# Allegro board volt_ctrl.brd
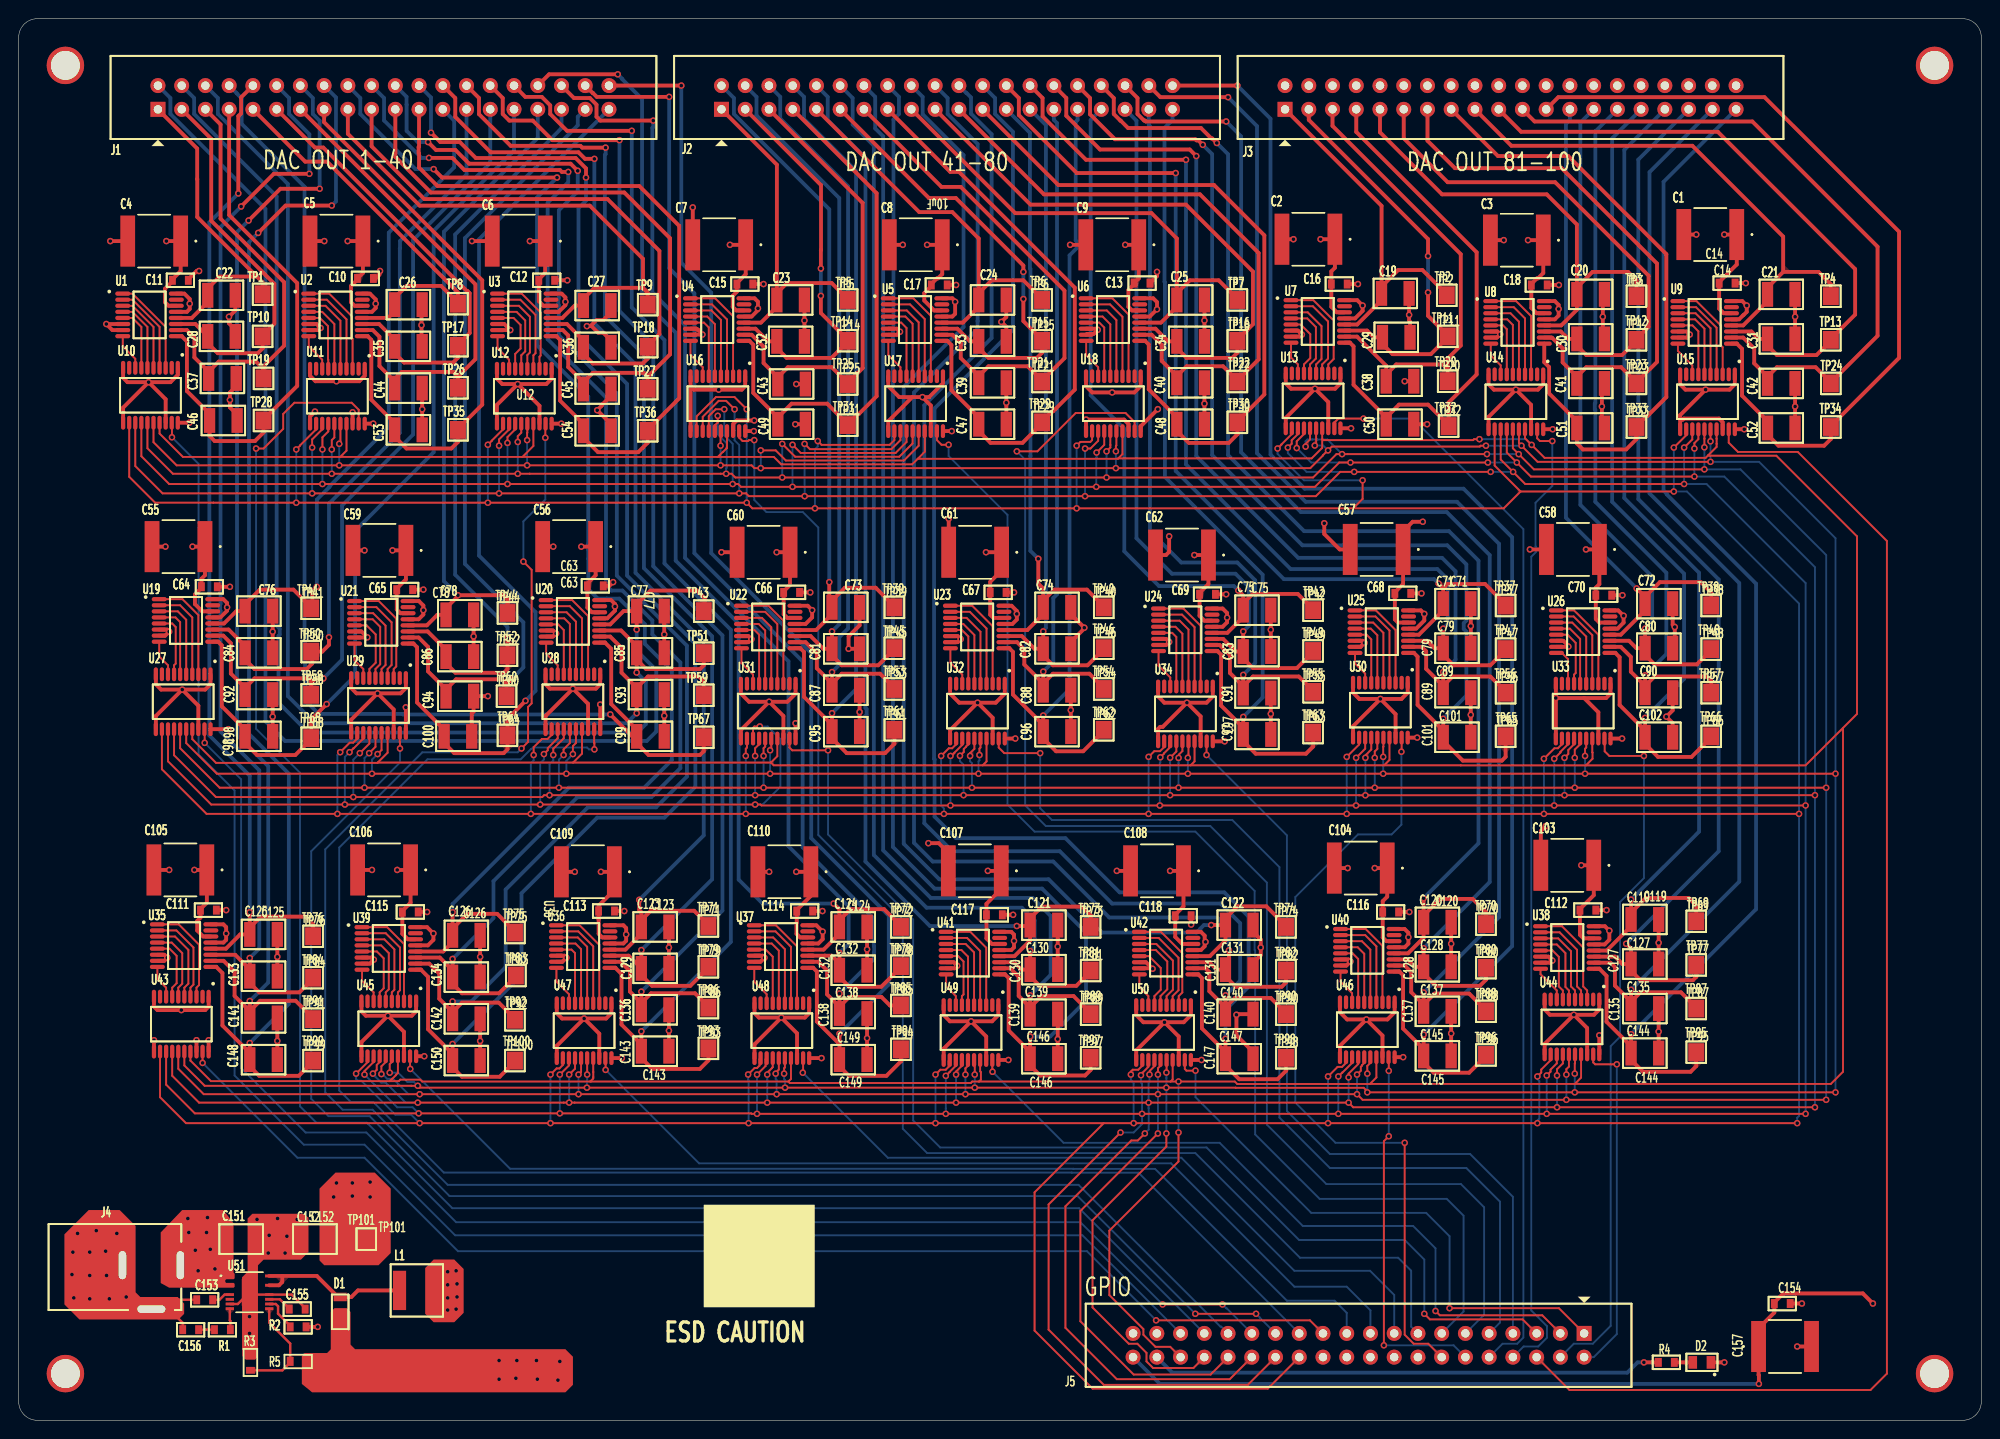
[diagram p0: board, top side]
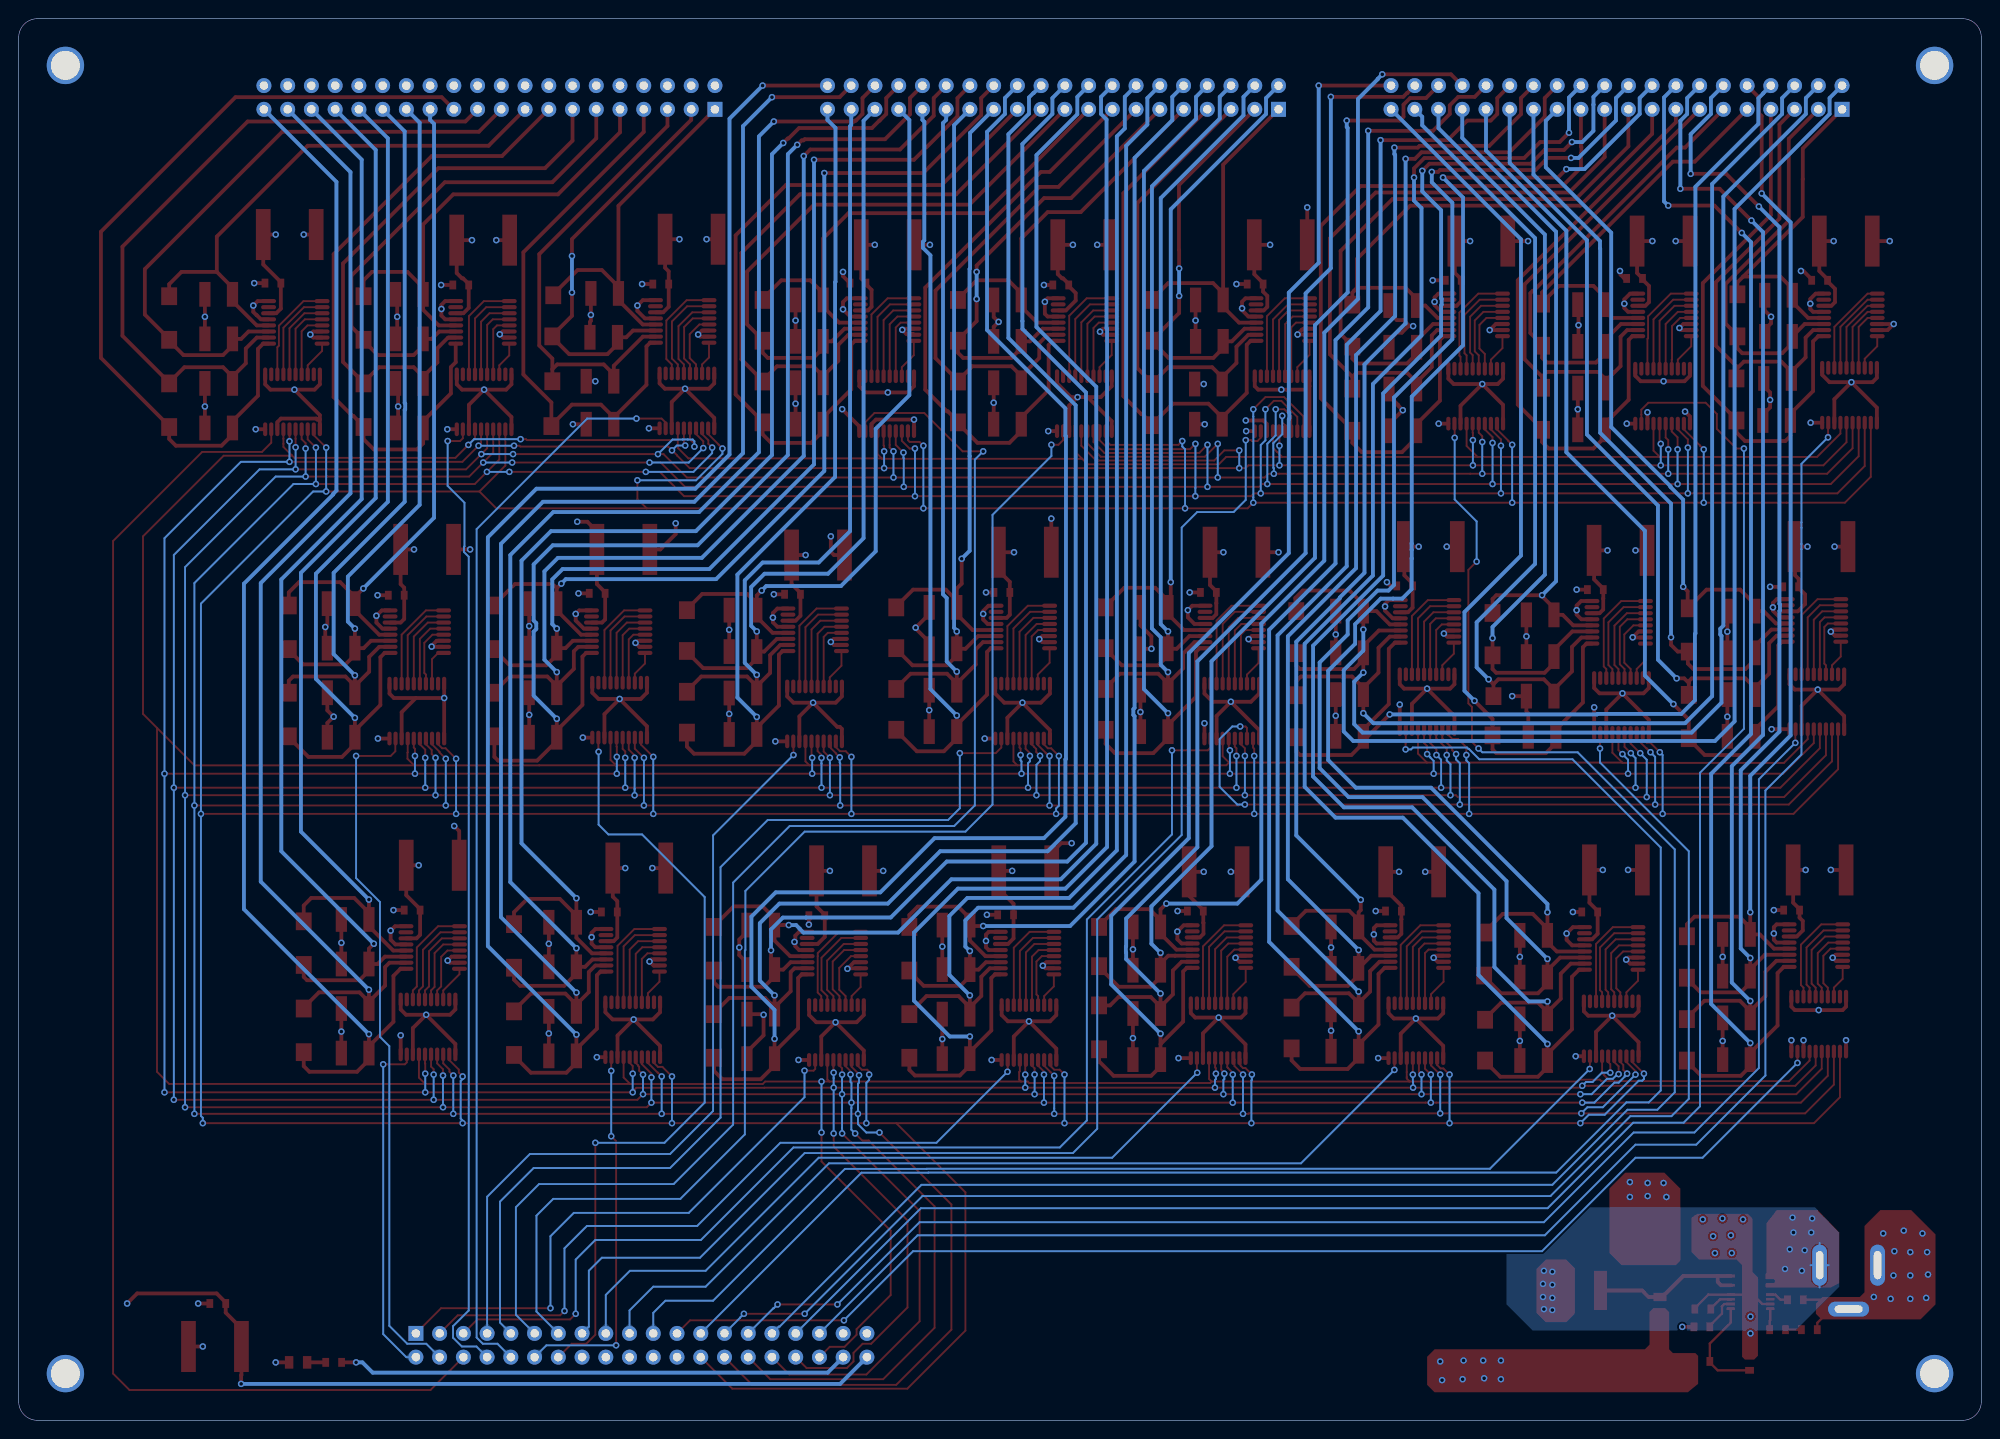
[diagram p1: board, bottom side, seen from below]

Outline 210 x 150 mm; copper layers: TOP, GND, PWR, BOTTOM. Coordinates in mm from the lower left corner of the outline.
Outline path: 0,148 arc(0.59,149.41) 2,150 208,150 arc(209.41,149.41) 210,148 210,2 arc(209.41,0.59) 208,0 2,0 arc(0.59,0.59) 0,2 0,148

## Design rules (mm)
constraint set DEFAULT: min track width 0.203

## Placement (name value [footprint] x y rotation side)
C1  10uF  [2220_AVX-M]  181 126.9 180 top
C2  10uF  [2220_AVX-M]  138 126.4 180 top
C3  10uF  [2220_AVX-M]  160.3 126.3 180 top
C4  10uF  [2220_AVX-M]  14.5 126.2 180 top
C5  10uF  [2220_AVX-M]  34 126.2 180 top
C6  10uF  [2220_AVX-M]  53.5 126.2 180 top
C7  10uF  [2220_AVX-M]  74.96 125.8 180 top
C8  10uF  [2220_AVX-M]  95.99 125.8 180 top
C9  10uF  [2220_AVX-M]  117.01 125.8 180 top
C10  0.1uF  [CAP0603]  37.1 122.2 0 top
C11  0.1uF  [CAP0603]  17.3 122 0 top
C12  0.1uF  [CAP0603]  56.5 122 0 top
C13  0.1uF  [CAP0603]  120.2 121.7 0 top
C14  0.1uF  [CAP0603]  182.8 121.7 0 top
C15  0.1uF  [CAP0603]  77.7 121.6 0 top
C16  0.1uF  [CAP0603]  141.3 121.6 0 top
C17  0.1uF  [CAP0603]  98.5 121.5 0 top
C18  0.1uF  [CAP0603]  162.7 121.5 0 top
C19  4.7uF  [CAP1210]  147.3 120.6 180 top
C20  4.7uF  [CAP1210]  168.2 120.5 180 top
C21  4.7uF  [CAP1210]  188.6 120.5 180 top
C22  4.7uF  [CAP1210]  21.7 120.4 180 top
C23  4.7uF  [CAP1210]  82.6 119.9 180 top
C24  4.7uF  [CAP1210]  104.2 119.9 180 top
C25  4.7uF  [CAP1210]  125.4 119.9 180 top
C26  4.7uF  [CAP1210]  41.7 119.4 180 top
C27  4.7uF  [CAP1210]  61.9 119.3 180 top
C28  4.7uF  [CAP1210]  21.7 116 180 top
C29  4.7uF  [CAP1210]  147.4 115.9 180 top
C30  4.7uF  [CAP1210]  168.2 115.73 180 top
C31  4.7uF  [CAP1210]  188.6 115.73 180 top
C32  4.7uF  [CAP1210]  82.6 115.47 180 top
C33  4.7uF  [CAP1210]  104.2 115.47 180 top
C34  4.7uF  [CAP1210]  125.4 115.47 180 top
C35  4.7uF  [CAP1210]  41.7 114.93 180 top
C36  4.7uF  [CAP1210]  61.9 114.83 180 top
C37  4.7uF  [CAP1210]  21.8 111.5 180 top
C38  4.7uF  [CAP1210]  147.8 111.2 180 top
C39  4.7uF  [CAP1210]  104.2 111.03 180 top
C40  4.7uF  [CAP1210]  125.4 111.03 180 top
C41  4.7uF  [CAP1210]  168.2 110.97 180 top
C42  4.7uF  [CAP1210]  188.6 110.97 180 top
C43  4.7uF  [CAP1210]  82.7 110.9 180 top
C44  4.7uF  [CAP1210]  41.7 110.47 180 top
C45  4.7uF  [CAP1210]  61.9 110.37 180 top
C46  4.7uF  [CAP1210]  21.9 107 180 top
C47  4.7uF  [CAP1210]  104.2 106.6 180 top
C48  4.7uF  [CAP1210]  125.4 106.6 180 top
C49  4.7uF  [CAP1210]  82.7 106.6 180 top
C50  4.7uF  [CAP1210]  147.8 106.6 180 top
C51  4.7uF  [CAP1210]  168.2 106.2 180 top
C52  4.7uF  [CAP1210]  188.6 106.2 180 top
C53  4.7uF  [CAP1210]  41.7 106 180 top
C54  4.7uF  [CAP1210]  61.9 105.9 180 top
C55  10uF  [2220_AVX-M]  17.1 93.5 180 top
C56  10uF  [2220_AVX-M]  58.9 93.5 180 top
C57  10uF  [2220_AVX-M]  145.3 93.2 180 top
C58  10uF  [2220_AVX-M]  166.3 93.2 180 top
C59  10uF  [2220_AVX-M]  38.6 93.1 180 top
C60  10uF  [2220_AVX-M]  79.7 92.9 180 top
C61  10uF  [2220_AVX-M]  102.34 92.9 180 top
C62  10uF  [2220_AVX-M]  124.47 92.6 180 top
C63  0.1uF  [CAP0603]  61.7 89.3 0 top
C64  0.1uF  [CAP0603]  20.4 89.2 0 top
C65  0.1uF  [CAP0603]  41.3 88.9 0 top
C66  0.1uF  [CAP0603]  82.7 88.6 0 top
C67  0.1uF  [CAP0603]  104.8 88.6 0 top
C68  0.1uF  [CAP0603]  148.1 88.5 0 top
C69  0.1uF  [CAP0603]  127.2 88.4 0 top
C70  0.1uF  [CAP0603]  169.6 88.3 0 top
C71  4.7uF  [CAP1210]  153.9 87.4 180 top
C72  4.7uF  [CAP1210]  175.5 87.4 180 top
C73  4.7uF  [CAP1210]  88.5 87 180 top
C74  4.7uF  [CAP1210]  111.1 87 180 top
C75  4.7uF  [CAP1210]  132.5 86.7 180 top
C76  4.7uF  [CAP1210]  25.7 86.6 180 top
C77  4.7uF  [CAP1210]  67.6 86.6 180 top
C78  4.7uF  [CAP1210]  47.2 86.2 180 top
C79  4.7uF  [CAP1210]  153.9 82.63 180 top
C80  4.7uF  [CAP1210]  175.5 82.63 180 top
C81  4.7uF  [CAP1210]  88.5 82.57 180 top
C82  4.7uF  [CAP1210]  111.1 82.57 180 top
C83  4.7uF  [CAP1210]  132.5 82.27 180 top
C84  4.7uF  [CAP1210]  25.7 82.13 180 top
C85  4.7uF  [CAP1210]  67.6 82.13 180 top
C86  4.7uF  [CAP1210]  47.2 81.73 180 top
C87  4.7uF  [CAP1210]  88.5 78.13 180 top
C88  4.7uF  [CAP1210]  111.1 78.13 180 top
C89  4.7uF  [CAP1210]  153.9 77.87 180 top
C90  4.7uF  [CAP1210]  175.5 77.87 180 top
C91  4.7uF  [CAP1210]  132.5 77.83 180 top
C92  4.7uF  [CAP1210]  25.7 77.67 180 top
C93  4.7uF  [CAP1210]  67.6 77.67 180 top
C94  4.7uF  [CAP1210]  47.2 77.5 180 top
C95  4.7uF  [CAP1210]  88.5 73.7 180 top
C96  4.7uF  [CAP1210]  111.1 73.7 180 top
C97  4.7uF  [CAP1210]  132.5 73.4 180 top
C98  4.7uF  [CAP1210]  25.7 73.2 180 top
C99  4.7uF  [CAP1210]  67.6 73.2 180 top
C100  4.7uF  [CAP1210]  47 73.2 180 top
C101  4.7uF  [CAP1210]  153.9 73.1 180 top
C102  4.7uF  [CAP1210]  175.5 73.1 180 top
C103  10uF  [2220_AVX-M]  165.7 59.4 180 top
C104  10uF  [2220_AVX-M]  143.6 59.1 180 top
C105  10uF  [2220_AVX-M]  17.3 58.9 180 top
C106  10uF  [2220_AVX-M]  39.1 58.9 180 top
C107  10uF  [2220_AVX-M]  102.3 58.8 180 top
C108  10uF  [2220_AVX-M]  121.8 58.8 180 top
C109  10uF  [2220_AVX-M]  60.9 58.7 180 top
C110  10uF  [2220_AVX-M]  81.93 58.7 180 top
C111  0.1uF  [CAP0603]  20.3 54.6 0 top
C112  0.1uF  [CAP0603]  167.9 54.6 0 top
C113  0.1uF  [CAP0603]  62.9 54.5 0 top
C114  0.1uF  [CAP0603]  84.1 54.5 0 top
C115  0.1uF  [CAP0603]  41.9 54.4 0 top
C116  0.1uF  [CAP0603]  146.8 54.4 0 top
C117  0.1uF  [CAP0603]  104.4 54.1 0 top
C118  0.1uF  [CAP0603]  124.6 54 0 top
C119  4.7uF  [CAP1210]  174 53.6 180 top
C120  4.7uF  [CAP1210]  151.8 53.3 180 top
C121  4.7uF  [CAP1210]  109.7 53 180 top
C122  4.7uF  [CAP1210]  130.6 53 180 top
C123  4.7uF  [CAP1210]  68.1 52.8 180 top
C124  4.7uF  [CAP1210]  89.3 52.8 180 top
C125  4.7uF  [CAP1210]  26.2 52 180 top
C126  4.7uF  [CAP1210]  47.9 51.9 180 top
C127  4.7uF  [CAP1210]  174 48.83 180 top
C128  4.7uF  [CAP1210]  151.8 48.53 180 top
C129  4.7uF  [CAP1210]  68.1 48.37 180 top
C130  4.7uF  [CAP1210]  109.7 48.23 180 top
C131  4.7uF  [CAP1210]  130.6 48.23 180 top
C132  4.7uF  [CAP1210]  89.3 48.17 180 top
C133  4.7uF  [CAP1210]  26.2 47.53 180 top
C134  4.7uF  [CAP1210]  47.9 47.43 180 top
C135  4.7uF  [CAP1210]  174 44.07 180 top
C136  4.7uF  [CAP1210]  68.1 43.93 180 top
C137  4.7uF  [CAP1210]  151.8 43.77 180 top
C138  4.7uF  [CAP1210]  89.3 43.53 180 top
C139  4.7uF  [CAP1210]  109.7 43.47 180 top
C140  4.7uF  [CAP1210]  130.6 43.47 180 top
C141  4.7uF  [CAP1210]  26.2 43.07 180 top
C142  4.7uF  [CAP1210]  47.9 42.97 180 top
C143  4.7uF  [CAP1210]  68.1 39.5 180 top
C144  4.7uF  [CAP1210]  174 39.3 180 top
C145  4.7uF  [CAP1210]  151.8 39 180 top
C146  4.7uF  [CAP1210]  109.7 38.7 180 top
C147  4.7uF  [CAP1210]  130.6 38.7 180 top
C148  4.7uF  [CAP1210]  26.2 38.6 180 top
C149  4.7uF  [CAP1210]  89.3 38.6 180 top
C150  4.7uF  [CAP1210]  47.9 38.5 180 top
C151  4.7uF  [CAP1210]  23.8 19.4 0 top
C152  4.7uF  [CAP1210]  31.7 19.4 180 top
C153  1uF  [CAP0603]  19.9 12.9 180 top
C154  0.1uF  [CAP0603]  188.7 12.5 180 top
C155  10nF  [CAP0603]  29.8 11.9 0 top
C156  150pF  [CAP0603]  18.4 9.7 180 top
C157  10uF  [2220_AVX-M]  189 7.9 0 top
D1  DFLS260  [DIODE_DFLS260]  34.4 11.6 270 top
D2  LED  [LED0805]  180.1 6.2 180 top
J1  HEADER 20X2  [SHDR2X20-254]  14.9 140.3 0 top
J2  HEADER 20X2  [SHDR2X20-254]  75.2 140.3 0 top
J3  HEADER 20X2  [SHDR2X20-254]  135.5 140.3 0 top
J4  PWR2.5  [DC-005_5521]  14.2 16.6 0 top
J5  HEADER 20X2  [SHDR2X20-254]  167.5 9.3 180 top
L1  6.8uH  [SWPA5040S6R8MT]  42.6 13.9 180 top
NOREF  -  []  0 2 0 top
NOREF#2  -  []  208 0 90 top
NOREF#3  -  [unnamed#2]  5 5 0 top
NOREF#4  -  [unnamed#2]  205 5 0 top
NOREF#5  -  [unnamed#2]  5 145 0 top
NOREF#6  -  [unnamed#2]  205 145 0 top
NOREF#7  -  []  73.3 12.1 0 top
R1  57.6K  [CAP0603]  21.8 9.7 180 top
R2  20K  [CAP0603]  29.9 10 0 top
R3  34.8K  [CAP0603]  24.8 6.2 90 top
R4  2.2K  [CAP0603]  176.3 6.2 0 top
R5  1M  [CAP0603]  29.9 6.3 180 top
TP1  TestPoint  [TESTPOINT_PAD]  26.1 120.5 0 top
TP2  TestPoint  [TESTPOINT_PAD]  152.8 120.4 0 top
TP3  TestPoint  [TESTPOINT_PAD]  173.1 120.3 0 top
TP4  TestPoint  [TESTPOINT_PAD]  193.9 120.3 0 top
TP5  TestPoint  [TESTPOINT_PAD]  88.7 119.9 0 top
TP6  TestPoint  [TESTPOINT_PAD]  109.5 119.9 0 top
TP7  TestPoint  [TESTPOINT_PAD]  130.4 119.9 0 top
TP8  TestPoint  [TESTPOINT_PAD]  47 119.5 0 top
TP9  TestPoint  [TESTPOINT_PAD]  67.3 119.4 0 top
TP10  TestPoint  [TESTPOINT_PAD]  26.1 116 0 top
TP11  TestPoint  [TESTPOINT_PAD]  152.9 116 0 top
TP12  TestPoint  [TESTPOINT_PAD]  173.1 115.63 0 top
TP13  TestPoint  [TESTPOINT_PAD]  193.9 115.63 0 top
TP14  TestPoint  [TESTPOINT_PAD]  88.7 115.53 0 top
TP15  TestPoint  [TESTPOINT_PAD]  109.5 115.53 0 top
TP16  TestPoint  [TESTPOINT_PAD]  130.4 115.53 0 top
TP17  TestPoint  [TESTPOINT_PAD]  47 115 0 top
TP18  TestPoint  [TESTPOINT_PAD]  67.3 114.9 0 top
TP19  TestPoint  [TESTPOINT_PAD]  26.2 111.5 0 top
TP20  TestPoint  [TESTPOINT_PAD]  152.9 111.2 0 top
TP21  TestPoint  [TESTPOINT_PAD]  109.5 111.17 0 top
TP22  TestPoint  [TESTPOINT_PAD]  130.4 111.17 0 top
TP23  TestPoint  [TESTPOINT_PAD]  173.1 110.97 0 top
TP24  TestPoint  [TESTPOINT_PAD]  193.9 110.97 0 top
TP25  TestPoint  [TESTPOINT_PAD]  88.7 110.9 0 top
TP26  TestPoint  [TESTPOINT_PAD]  47 110.5 0 top
TP27  TestPoint  [TESTPOINT_PAD]  67.3 110.4 0 top
TP28  TestPoint  [TESTPOINT_PAD]  26.2 107 0 top
TP29  TestPoint  [TESTPOINT_PAD]  109.5 106.8 0 top
TP30  TestPoint  [TESTPOINT_PAD]  130.4 106.8 0 top
TP31  TestPoint  [TESTPOINT_PAD]  88.7 106.5 0 top
TP32  TestPoint  [TESTPOINT_PAD]  153 106.4 0 top
TP33  TestPoint  [TESTPOINT_PAD]  173.1 106.3 0 top
TP34  TestPoint  [TESTPOINT_PAD]  193.9 106.3 0 top
TP35  TestPoint  [TESTPOINT_PAD]  47 106 0 top
TP36  TestPoint  [TESTPOINT_PAD]  67.3 105.9 0 top
TP37  TestPoint  [TESTPOINT_PAD]  159.1 87.2 0 top
TP38  TestPoint  [TESTPOINT_PAD]  181.1 87.2 0 top
TP39  TestPoint  [TESTPOINT_PAD]  93.7 87 0 top
TP40  TestPoint  [TESTPOINT_PAD]  116.1 87 0 top
TP41  TestPoint  [TESTPOINT_PAD]  31.3 86.9 0 top
TP42  TestPoint  [TESTPOINT_PAD]  138.5 86.7 0 top
TP43  TestPoint  [TESTPOINT_PAD]  73.3 86.6 0 top
TP44  TestPoint  [TESTPOINT_PAD]  52.3 86.4 0 top
TP45  TestPoint  [TESTPOINT_PAD]  93.7 82.63 0 top
TP46  TestPoint  [TESTPOINT_PAD]  116.1 82.63 0 top
TP47  TestPoint  [TESTPOINT_PAD]  159.1 82.53 0 top
TP48  TestPoint  [TESTPOINT_PAD]  181.1 82.53 0 top
TP49  TestPoint  [TESTPOINT_PAD]  138.5 82.33 0 top
TP50  TestPoint  [TESTPOINT_PAD]  31.3 82.27 0 top
TP51  TestPoint  [TESTPOINT_PAD]  73.3 82.1 0 top
TP52  TestPoint  [TESTPOINT_PAD]  52.3 81.87 0 top
TP53  TestPoint  [TESTPOINT_PAD]  93.7 78.27 0 top
TP54  TestPoint  [TESTPOINT_PAD]  116.1 78.27 0 top
TP55  TestPoint  [TESTPOINT_PAD]  138.5 77.97 0 top
TP56  TestPoint  [TESTPOINT_PAD]  159.1 77.87 0 top
TP57  TestPoint  [TESTPOINT_PAD]  181.1 77.87 0 top
TP58  TestPoint  [TESTPOINT_PAD]  31.3 77.63 0 top
TP59  TestPoint  [TESTPOINT_PAD]  73.3 77.6 0 top
TP60  TestPoint  [TESTPOINT_PAD]  52.2 77.5 0 top
TP61  TestPoint  [TESTPOINT_PAD]  93.7 73.9 0 top
TP62  TestPoint  [TESTPOINT_PAD]  116.1 73.9 0 top
TP63  TestPoint  [TESTPOINT_PAD]  138.5 73.6 0 top
TP64  TestPoint  [TESTPOINT_PAD]  52.3 73.3 0 top
TP65  TestPoint  [TESTPOINT_PAD]  159.1 73.2 0 top
TP66  TestPoint  [TESTPOINT_PAD]  181.1 73.2 0 top
TP67  TestPoint  [TESTPOINT_PAD]  73.3 73.1 0 top
TP68  TestPoint  [TESTPOINT_PAD]  31.3 73 0 top
TP69  TestPoint  [TESTPOINT_PAD]  179.5 53.4 0 top
TP70  TestPoint  [TESTPOINT_PAD]  157 53.1 0 top
TP71  TestPoint  [TESTPOINT_PAD]  73.8 52.9 0 top
TP72  TestPoint  [TESTPOINT_PAD]  94.4 52.8 0 top
TP73  TestPoint  [TESTPOINT_PAD]  114.7 52.8 0 top
TP74  TestPoint  [TESTPOINT_PAD]  135.6 52.8 0 top
TP75  TestPoint  [TESTPOINT_PAD]  53.1 52.2 0 top
TP76  TestPoint  [TESTPOINT_PAD]  31.5 51.8 0 top
TP77  TestPoint  [TESTPOINT_PAD]  179.5 48.73 0 top
TP78  TestPoint  [TESTPOINT_PAD]  94.4 48.6 0 top
TP79  TestPoint  [TESTPOINT_PAD]  73.8 48.53 0 top
TP80  TestPoint  [TESTPOINT_PAD]  157 48.43 0 top
TP81  TestPoint  [TESTPOINT_PAD]  114.7 48.13 0 top
TP82  TestPoint  [TESTPOINT_PAD]  135.6 48.13 0 top
TP83  TestPoint  [TESTPOINT_PAD]  53.2 47.6 0 top
TP84  TestPoint  [TESTPOINT_PAD]  31.5 47.37 0 top
TP85  TestPoint  [TESTPOINT_PAD]  94.4 44.4 0 top
TP86  TestPoint  [TESTPOINT_PAD]  73.8 44.17 0 top
TP87  TestPoint  [TESTPOINT_PAD]  179.5 44.07 0 top
TP88  TestPoint  [TESTPOINT_PAD]  157 43.77 0 top
TP89  TestPoint  [TESTPOINT_PAD]  114.7 43.47 0 top
TP90  TestPoint  [TESTPOINT_PAD]  135.6 43.47 0 top
TP91  TestPoint  [TESTPOINT_PAD]  31.5 42.93 0 top
TP92  TestPoint  [TESTPOINT_PAD]  53.1 42.87 0 top
TP93  TestPoint  [TESTPOINT_PAD]  73.8 39.8 0 top
TP94  TestPoint  [TESTPOINT_PAD]  94.4 39.7 0 top
TP95  TestPoint  [TESTPOINT_PAD]  179.5 39.4 0 top
TP96  TestPoint  [TESTPOINT_PAD]  157 39.1 0 top
TP97  TestPoint  [TESTPOINT_PAD]  114.7 38.8 0 top
TP98  TestPoint  [TESTPOINT_PAD]  135.6 38.8 0 top
TP99  TestPoint  [TESTPOINT_PAD]  31.5 38.5 0 top
TP100  TestPoint  [TESTPOINT_PAD]  53.1 38.5 0 top
TP101  TestPoint  [TESTPOINT_PAD]  37.2 19.4 0 top
U1  AD5504  [TSSOP-16N]  14 118.3 0 top
U2  AD5504  [TSSOP-16N]  33.9 118.3 0 top
U3  AD5504  [TSSOP-16N]  54.1 118.3 0 top
U4  AD5504  [TSSOP-16N]  74.74 117.8 0 top
U5  AD5504  [TSSOP-16N]  95.91 117.8 0 top
U6  AD5504  [TSSOP-16N]  117.09 117.8 0 top
U7  AD5504  [TSSOP-16N]  139 117.6 0 top
U8  AD5504  [TSSOP-16N]  160.37 117.5 0 top
U9  AD5504  [TSSOP-16N]  180.4 117.5 0 top
U10  74HC245  [TSSOP-20N]  14.1 109.7 270 top
U11  74HC245  [TSSOP-20N]  34.1 109.6 270 top
U12  74HC245  [TSSOP-20N]  54.1 109.6 270 top
U13  74HC245  [TSSOP-20N]  138.5 109.1 270 top
U14  74HC245  [TSSOP-20N]  160.2 109 270 top
U15  74HC245  [TSSOP-20N]  180.7 109 270 top
U16  74HC245  [TSSOP-20N]  74.81 108.8 270 top
U17  74HC245  [TSSOP-20N]  95.97 108.8 270 top
U18  74HC245  [TSSOP-20N]  117.13 108.8 270 top
U19  AD5504  [TSSOP-16N]  17.9 85.6 0 top
U20  AD5504  [TSSOP-16N]  59.3 85.5 0 top
U21  AD5504  [TSSOP-16N]  38.8 85.4 0 top
U22  AD5504  [TSSOP-16N]  80.2 84.9 0 top
U23  AD5504  [TSSOP-16N]  102.56 84.9 0 top
U24  AD5504  [TSSOP-16N]  124.83 84.6 0 top
U25  AD5504  [TSSOP-16N]  145.85 84.4 0 top
U26  AD5504  [TSSOP-16N]  167.4 84.4 0 top
U27  74HC245  [TSSOP-20N]  17.6 76.9 270 top
U28  74HC245  [TSSOP-20N]  59.3 76.9 270 top
U29  74HC245  [TSSOP-20N]  38.5 76.5 270 top
U30  74HC245  [TSSOP-20N]  145.7 76 270 top
U31  74HC245  [TSSOP-20N]  80.2 75.9 270 top
U32  74HC245  [TSSOP-20N]  102.59 75.9 270 top
U33  74HC245  [TSSOP-20N]  167.4 75.9 270 top
U34  74HC245  [TSSOP-20N]  124.84 75.6 270 top
U35  AD5504  [TSSOP-16N]  17.7 50.8 0 top
U36  AD5504  [TSSOP-16N]  60.4 50.7 0 top
U37  AD5504  [TSSOP-16N]  81.57 50.7 0 top
U38  AD5504  [TSSOP-16N]  165.7 50.6 0 top
U39  AD5504  [TSSOP-16N]  39.6 50.5 0 top
U40  AD5504  [TSSOP-16N]  144.3 50.3 0 top
U41  AD5504  [TSSOP-16N]  102.1 50 0 top
U42  AD5504  [TSSOP-16N]  122.77 50 0 top
U43  74HC245  [TSSOP-20N]  17.4 42.4 270 top
U44  74HC245  [TSSOP-20N]  166.2 42.1 270 top
U45  74HC245  [TSSOP-20N]  39.6 41.9 270 top
U46  74HC245  [TSSOP-20N]  144.3 41.8 270 top
U47  74HC245  [TSSOP-20N]  60.5 41.7 270 top
U48  74HC245  [TSSOP-20N]  81.66 41.7 270 top
U49  74HC245  [TSSOP-20N]  101.9 41.5 270 top
U50  74HC245  [TSSOP-20N]  122.5 41.5 270 top
U51  LT8362  [MSE_16A_ADI]  24.7 13.7 0 top

## Library data of the parts
C1-C9 C55-C62 C103-C110 C157 = CAPACITOR POL
C10-C54 C63-C102 C111-C156 = CAP NP
D1 = DIODE SCHOTTKY
D2 = LED
J1-J3 J5 = HEADER 20X2
J4 = PWR2.5
L1 = INDUCTOR
R1-R5 = R
TP1-TP101 = TestPoint
U1-U9 U19-U26 U35-U42 = AD5504
U10-U18 U27-U34 U43-U50 = 74HC245
U51 = LT8362

## Footprints (pads in the part's own frame, mm; a bottom-side part is the same pattern mirrored in y, then rotated)
2220_AVX-M
  rect 1.575x5.461 smd: 1(-2.832,0) 2(2.832,0)
CAP0603
  rect 0.725x0.95 smd: 1(-0.85,0) 2(0.85,0)
CAP1210
  rect 1.2x2.65 smd: 1(-1.475,0) 2(1.475,0)
DC-005_5521
  oval 4.4x1.6 hole 3x0.8: 2(0,-4.7)
  oval 1.6x4.4 hole 0.8x3: 3(-3.1,0) 4(3.1,0)
DIODE_DFLS260
  rect 0.9x1.4 smd: 1(-1.6,0)
  rect 2.2x1.4 smd: 2(0.95,0)
LED0805
  rect 0.9x1.35 smd: 1(-0.965,0) 2(0.965,0)
MSE_16A_ADI
  rect 0.889x0.305 smd: 1(-2.108,1.751) 3(-2.108,0.751) 5(-2.108,-0.25) 6(-2.108,-0.751) 7(-2.108,-1.251) 8(-2.108,-1.751) 9(2.108,-1.751) 10(2.108,-1.251) 11(2.108,-0.751) 12(2.108,-0.25) 14(2.108,0.751) 16(2.108,1.751)
  rect 1.651x2.845 smd: 17(0,0)
SHDR2X20-254
  rect 1.6x1.6 hole 0.9: 1(0,0)
  round 1.6 hole 0.9: 2(0,2.54) 3(2.54,0) 4(2.54,2.54) 5(5.08,0) 6(5.08,2.54) 7(7.62,0) 8(7.62,2.54) 9(10.16,0) 10(10.16,2.54) 11(12.7,0) 12(12.7,2.54) 13(15.24,0) 14(15.24,2.54) 15(17.78,0) 16(17.78,2.54) 17(20.32,0) 18(20.32,2.54) 19(22.86,0) 20(22.86,2.54) 21(25.4,0) 22(25.4,2.54) 23(27.94,0) 24(27.94,2.54) 25(30.48,0) 26(30.48,2.54) 27(33.02,0) 28(33.02,2.54) 29(35.56,0) 30(35.56,2.54) 31(38.1,0) 32(38.1,2.54) 33(40.64,0) 34(40.64,2.54) 35(43.18,0) 36(43.18,2.54) 37(45.72,0) 38(45.72,2.54) 39(48.26,0) 40(48.26,2.54)
SWPA5040S6R8MT
  rect 1.4x4.2 smd: 1(-1.85,0) 2(1.85,0)
TESTPOINT_PAD
  rect 1.7x1.9 smd: 1(0,0)
TSSOP-16N
  oval 1.6x0.45 smd: 1(-2.862,2.275) 2(-2.862,1.625) 3(-2.862,0.975) 4(-2.862,0.325) 5(-2.862,-0.325) 6(-2.862,-0.975) 7(-2.862,-1.625) 8(-2.862,-2.275) 9(2.862,-2.275) 10(2.862,-1.625) 11(2.862,-0.975) 12(2.862,-0.325) 13(2.862,0.325) 14(2.862,0.975) 15(2.862,1.625) 16(2.862,2.275)
TSSOP-20N
  oval 1.475x0.45 smd: 1(-2.938,2.925) 2(-2.938,2.275) 3(-2.938,1.625) 4(-2.938,0.975) 5(-2.938,0.325) 6(-2.938,-0.325) 7(-2.938,-0.975) 8(-2.938,-1.625) 9(-2.938,-2.275) 10(-2.938,-2.925) 11(2.938,-2.925) 12(2.938,-2.275) 13(2.938,-1.625) 14(2.938,-0.975) 15(2.938,-0.325) 16(2.938,0.325) 17(2.938,0.975) 18(2.938,1.625) 19(2.938,2.275) 20(2.938,2.925)
unnamed#2
  round 4 hole 3.1: (0,0)

## Nets
3V3: J5.38 R4.1
48V: C1.1 C2.1 C3.1 C4.1 C5.1 C6.1 C7.1 C8.1 C9.1 C10.1 C11.1 C12.1 C13.1 C14.1 C15.1 C16.1 C17.1 C18.1 C55.1 C56.1 C57.1 C58.1 C59.1 C60.1 C61.1 C62.1 C63.1 C64.1 C65.1 C66.1 C67.1 C68.1 C69.1 C70.1 C103.1 C104.1 C105.1 C106.1 C107.1 C108.1 C109.1 C110.1 C111.1 C112.1 C113.1 C114.1 C115.1 C116.1 C117.1 C118.1 C152.1 D1.2(CATHODE) R5.1 TP101.1 U1.14 U2.14 U3.14 U4.14 U5.14 U6.14 U7.14 U8.14 U9.14 U19.14 U20.14 U21.14 U22.14 U23.14 U24.14 U25.14 U26.14 U35.14 U36.14 U37.14 U38.14 U39.14 U40.14 U41.14 U42.14
GND: C1.2 C2.2 C3.2 C4.2 C5.2 C6.2 C7.2 C8.2 C9.2 C10.2 C11.2 C12.2 C13.2 C14.2 C15.2 C16.2 C17.2 C18.2 C19.1 C20.1 C21.1 C22.1 C23.1 C24.1 C25.1 C26.1 C27.1 C28.1 C29.1 C30.1 C31.1 C32.1 C33.1 C34.1 C35.1 C36.1 C37.1 C38.1 C39.1 C40.1 C41.1 C42.1 C43.1 C44.1 C45.1 C46.1 C47.1 C48.1 C49.1 C50.1 C51.1 C52.1 C53.1 C54.1 C55.2 C56.2 C57.2 C58.2 C59.2 C60.2 C61.2 C62.2 C63.2 C64.2 C65.2 C66.2 C67.2 C68.2 C69.2 C70.2 C71.1 C72.1 C73.1 C74.1 C75.1 C76.1 C77.1 C78.1 C79.1 C80.1 C81.1 C82.1 C83.1 C84.1 C85.1 C86.1 C87.1 C88.1 C89.1 C90.1 C91.1 C92.1 C93.1 C94.1 C95.1 C96.1 C97.1 C98.1 C99.1 C100.1 C101.1 C102.1 C103.2 C104.2 C105.2 C106.2 C107.2 C108.2 C109.2 C110.2 C111.2 C112.2 C113.2 C114.2 C115.2 C116.2 C117.2 C118.2 C119.1 C120.1 C121.1 C122.1 C123.1 C124.1 C125.1 C126.1 C127.1 C128.1 C129.1 C130.1 C131.1 C132.1 C133.1 C134.1 C135.1 C136.1 C137.1 C138.1 C139.1 C140.1 C141.1 C142.1 C143.1 C144.1 C145.1 C146.1 C147.1 C148.1 C149.1 C150.1 C151.2 C152.2 C153.2 C154.1 C155.2 C156.2 C157.2 D2.1(CATHODE) J4.2 J4.3 J5.37 J5.39 R2.2 R3.2 U1.6 U1.7 U2.6 U2.7 U3.6 U3.7 U4.6 U4.7 U5.6 U5.7 U6.6 U6.7 U7.6 U7.7 U8.6 U8.7 U9.6 U9.7 U10.1 U10.10 U10.11 U10.18 U11.1 U11.10 U11.11 U11.18 U12.1 U12.10 U12.11 U12.18 U13.1 U13.10 U13.11 U13.18 U14.1 U14.10 U14.11 U14.18 U15.1 U15.10 U15.11 U15.18 U16.1 U16.10 U16.11 U16.18 U17.1 U17.10 U17.11 U17.18 U18.1 U18.10 U18.11 U18.18 U19.6 U19.7 U20.6 U20.7 U21.6 U21.7 U22.6 U22.7 U23.6 U23.7 U24.6 U24.7 U25.6 U25.7 U26.6 U26.7 U27.1 U27.10 U27.11 U27.18 U28.1 U28.10 U28.11 U28.18 U29.1 U29.10 U29.11 U29.18 U30.1 U30.10 U30.11 U30.18 U31.1 U31.10 U31.11 U31.18 U32.1 U32.10 U32.11 U32.18 U33.1 U33.10 U33.11 U33.18 U34.1 U34.10 U34.11 U34.18 U35.6 U35.7 U36.6 U36.7 U37.6 U37.7 U38.6 U38.7 U39.6 U39.7 U40.6 U40.7 U41.6 U41.7 U42.6 U42.7 U43.1 U43.10 U43.11 U43.18 U44.1 U44.10 U44.11 U44.18 U45.1 U45.10 U45.11 U45.18 U46.1 U46.10 U46.11 U46.18 U47.1 U47.10 U47.11 U47.18 U48.1 U48.10 U48.11 U48.18 U49.1 U49.10 U49.11 U49.18 U50.1 U50.10 U50.11 U50.18 U51.7 U51.12 U51.17
COE_CLR#: J5.36 U10.17 U11.17 U12.17 U13.17 U14.17 U15.17 U16.17 U17.17 U18.17 U27.17 U28.17 U29.17 U30.17 U31.17 U32.17 U33.17 U34.17 U43.17 U44.17 U45.17 U46.17 U47.17 U48.17 U49.17 U50.17
COE_LDAC#: J5.26 U10.12 U11.12 U12.12 U13.12 U14.12 U15.12 U16.12 U17.12 U18.12 U27.12 U28.12 U29.12 U30.12 U31.12 U32.12 U33.12 U34.12 U43.12 U44.12 U45.12 U46.12 U47.12 U48.12 U49.12 U50.12
COE_SCLK: J5.32 U10.15 U11.15 U12.15 U13.15 U14.15 U15.15 U16.15 U17.15 U18.15 U27.15 U28.15 U29.15 U30.15 U31.15 U32.15 U33.15 U34.15 U43.15 U44.15 U45.15 U46.15 U47.15 U48.15 U49.15 U50.15
COE_SDI: J5.30 U10.14 U11.14 U12.14 U13.14 U14.14 U15.14 U16.14 U17.14 U18.14 U27.14 U28.14 U29.14 U30.14 U31.14 U32.14 U33.14 U34.14 U43.14 U44.14 U45.14 U46.14 U47.14 U48.14 U49.14 U50.14
COE_SDO: J5.28 U10.13 U11.13 U12.13 U13.13 U14.13 U15.13 U16.13 U17.13 U18.13 U27.13 U28.13 U29.13 U30.13 U31.13 U32.13 U33.13 U34.13 U43.13 U44.13 U45.13 U46.13 U47.13 U48.13 U49.13 U50.13
COE_SYNC#: J5.34 U10.16 U11.16 U12.16 U13.16 U14.16 U15.16 U16.16 U17.16 U18.16 U27.16 U28.16 U29.16 U30.16 U31.16 U32.16 U33.16 U34.16 U43.16 U44.16 U45.16 U46.16 U47.16 U48.16 U49.16 U50.16
DAOUT_1: C22.2 J1.1 TP1.1 U1.12
DAOUT_2: C28.2 J1.3 TP10.1 U1.11
DAOUT_3: C37.2 J1.5 TP19.1 U1.10
DAOUT_4: C46.2 J1.7 TP28.1 U1.9(VOUTD)
DAOUT_5: C26.2 J1.9 TP8.1 U2.12
DAOUT_6: C35.2 J1.11 TP17.1 U2.11
DAOUT_7: C44.2 J1.13 TP26.1 U2.10
DAOUT_8: C53.2 J1.15 TP35.1 U2.9(VOUTD)
DAOUT_9: C27.2 J1.17 TP9.1 U3.12
DAOUT_10: C36.2 J1.19 TP18.1 U3.11
DAOUT_11: C45.2 J1.21 TP27.1 U3.10
DAOUT_12: C54.2 J1.23 TP36.1 U3.9(VOUTD)
DAOUT_13: C76.2 J1.25 TP41.1 U19.12
DAOUT_14: C84.2 J1.27 TP50.1 U19.11
DAOUT_15: C92.2 J1.29 TP58.1 U19.10
DAOUT_16: C98.2 J1.31 TP68.1 U19.9(VOUTD)
DAOUT_17: C78.2 J1.33 TP44.1 U21.12
DAOUT_18: C86.2 J1.35 TP52.1 U21.11
DAOUT_19: C94.2 J1.37 TP60.1 U21.10
DAOUT_20: C100.2 J1.39 TP64.1 U21.9(VOUTD)
DAOUT_21: C77.2 J1.2 TP43.1 U20.12
DAOUT_22: C85.2 J1.4 TP51.1 U20.11
DAOUT_23: C93.2 J1.6 TP59.1 U20.10
DAOUT_24: C99.2 J1.8 TP67.1 U20.9(VOUTD)
DAOUT_25: C125.2 J1.10 TP76.1 U35.12
DAOUT_26: C133.2 J1.12 TP84.1 U35.11
DAOUT_27: C141.2 J1.14 TP91.1 U35.10
DAOUT_28: C148.2 J1.16 TP99.1 U35.9(VOUTD)
DAOUT_29: C126.2 J1.18 TP75.1 U39.12
DAOUT_30: C134.2 J1.20 TP83.1 U39.11
DAOUT_31: C142.2 J1.22 TP92.1 U39.10
DAOUT_32: C150.2 J1.24 TP100.1 U39.9(VOUTD)
DAOUT_33: C123.2 J1.26 TP71.1 U36.12
DAOUT_34: C129.2 J1.28 TP79.1 U36.11
DAOUT_35: C136.2 J1.30 TP86.1 U36.10
DAOUT_36: C143.2 J1.32 TP93.1 U36.9(VOUTD)
DAOUT_37: C124.2 J1.34 TP72.1 U37.12
DAOUT_38: C132.2 J1.36 TP78.1 U37.11
DAOUT_39: C138.2 J1.38 TP85.1 U37.10
DAOUT_40: C149.2 J1.40 TP94.1 U37.9(VOUTD)
DAOUT_41: C23.2 J2.1 TP5.1 U4.12
DAOUT_42: C32.2 J2.3 TP14.1 U4.11
DAOUT_43: C43.2 J2.5 TP25.1 U4.10
DAOUT_44: C49.2 J2.7 TP31.1 U4.9(VOUTD)
DAOUT_45: C24.2 J2.9 TP6.1 U5.12
DAOUT_46: C33.2 J2.11 TP15.1 U5.11
DAOUT_47: C39.2 J2.13 TP21.1 U5.10
DAOUT_48: C47.2 J2.15 TP29.1 U5.9(VOUTD)
DAOUT_49: C25.2 J2.17 TP7.1 U6.12
DAOUT_50: C34.2 J2.19 TP16.1 U6.11
DAOUT_51: C40.2 J2.21 TP22.1 U6.10
DAOUT_52: C48.2 J2.23 TP30.1 U6.9(VOUTD)
DAOUT_53: C74.2 J2.25 TP40.1 U23.12
DAOUT_54: C82.2 J2.27 TP46.1 U23.11
DAOUT_55: C88.2 J2.29 TP54.1 U23.10
DAOUT_56: C96.2 J2.31 TP62.1 U23.9(VOUTD)
DAOUT_57: C75.2 J2.33 TP42.1 U24.12
DAOUT_58: C83.2 J2.35 TP49.1 U24.11
DAOUT_59: C91.2 J2.37 TP55.1 U24.10
DAOUT_60: C97.2 J2.39 TP63.1 U24.9(VOUTD)
DAOUT_61: C73.2 J2.2 TP39.1 U22.12
DAOUT_62: C81.2 J2.4 TP45.1 U22.11
DAOUT_63: C87.2 J2.6 TP53.1 U22.10
DAOUT_64: C95.2 J2.8 TP61.1 U22.9(VOUTD)
DAOUT_65: C121.2 J2.10 TP73.1 U41.12
DAOUT_66: C130.2 J2.12 TP81.1 U41.11
DAOUT_67: C139.2 J2.14 TP89.1 U41.10
DAOUT_68: C146.2 J2.16 TP97.1 U41.9(VOUTD)
DAOUT_69: C122.2 J2.18 TP74.1 U42.12
DAOUT_70: C131.2 J2.20 TP82.1 U42.11
DAOUT_71: C140.2 J2.22 TP90.1 U42.10
DAOUT_72: C147.2 J2.24 TP98.1 U42.9(VOUTD)
DAOUT_73: C71.2 J2.26 TP37.1 U25.12
DAOUT_74: C79.2 J2.28 TP47.1 U25.11
DAOUT_75: C89.2 J2.30 TP56.1 U25.10
DAOUT_76: C101.2 J2.32 TP65.1 U25.9(VOUTD)
DAOUT_77: C120.2 J2.34 TP70.1 U40.12
DAOUT_78: C128.2 J2.36 TP80.1 U40.11
DAOUT_79: C137.2 J2.38 TP88.1 U40.10
DAOUT_80: C145.2 J2.40 TP96.1 U40.9(VOUTD)
DAOUT_81: C19.2 J3.1 TP2.1 U7.12
DAOUT_82: C29.2 J3.3 TP11.1 U7.11
DAOUT_83: C38.2 J3.5 TP20.1 U7.10
DAOUT_84: C50.2 J3.7 TP32.1 U7.9(VOUTD)
DAOUT_85: C20.2 J3.9 TP3.1 U8.12
DAOUT_86: C30.2 J3.11 TP12.1 U8.11
DAOUT_87: C41.2 J3.13 TP23.1 U8.10
DAOUT_88: C51.2 J3.15 TP33.1 U8.9(VOUTD)
DAOUT_89: C21.2 J3.17 TP4.1 U9.12
DAOUT_90: C31.2 J3.19 TP13.1 U9.11
DAOUT_91: C42.2 J3.21 TP24.1 U9.10
DAOUT_92: C52.2 J3.23 TP34.1 U9.9(VOUTD)
DAOUT_93: C72.2 J3.25 TP38.1 U26.12
DAOUT_94: C80.2 J3.27 TP48.1 U26.11
DAOUT_95: C90.2 J3.29 TP57.1 U26.10
DAOUT_96: C102.2 J3.31 TP66.1 U26.9(VOUTD)
DAOUT_97: C119.2 J3.33 TP69.1 U38.12
DAOUT_98: C127.2 J3.35 TP77.1 U38.11
DAOUT_99: C135.2 J3.37 TP87.1 U38.10
DAOUT_100: C144.2 J3.39 TP95.1 U38.9(VOUTD)
OE#1: J5.35 U10.19
OE#2: J5.33 U11.19
OE#3: J5.31 U12.19
OE#4: J5.29 U27.19
OE#5: J5.27 U29.19
OE#6: J5.25 U28.19
OE#7: J5.23 U43.19
OE#8: J5.21 U45.19
OE#9: J5.19 U47.19
OE#10: J5.17 U48.19
OE#11: J5.15 U16.19
OE#12: J5.13 U17.19
OE#13: J5.11 U18.19
OE#14: J5.9 U32.19
OE#15: J5.7 U34.19
OE#16: J5.5 U31.19
OE#17: J5.3 U49.19
OE#18: J5.1 U50.19
OE#19: J5.14 U30.19
OE#20: J5.12 U46.19
OE#21: J5.10 U13.19
OE#22: J5.8 U14.19
OE#23: J5.6 U15.19
OE#24: J5.4 U33.19
OE#25: J5.2 U44.19
VLOGIC: C154.2 C157.1 J5.40 U1.13 U1.16 U2.13 U2.16 U3.13 U3.16 U4.13 U4.16 U5.13 U5.16 U6.13 U6.16 U7.13 U7.16 U8.13 U8.16 U9.13 U9.16 U10.20(VDD) U11.20(VDD) U12.20(VDD) U13.20(VDD) U14.20(VDD) U15.20(VDD) U16.20(VDD) U17.20(VDD) U18.20(VDD) U19.13 U19.16 U20.13 U20.16 U21.13 U21.16 U22.13 U22.16 U23.13 U23.16 U24.13 U24.16 U25.13 U25.16 U26.13 U26.16 U27.20(VDD) U28.20(VDD) U29.20(VDD) U30.20(VDD) U31.20(VDD) U32.20(VDD) U33.20(VDD) U34.20(VDD) U35.13 U35.16 U36.13 U36.16 U37.13 U37.16 U38.13 U38.16 U39.13 U39.16 U40.13 U40.16 U41.13 U41.16 U42.13 U42.16 U43.20(VDD) U44.20(VDD) U45.20(VDD) U46.20(VDD) U47.20(VDD) U48.20(VDD) U49.20(VDD) U50.20(VDD)
N08512: U1.1 U10.3
N08516: U1.2 U10.4
N08520: U1.3 U10.5
N08524: U1.4 U10.6
N08528: U1.5 U10.7
N08532: U1.8 U10.8
N17317: U2.1 U11.3
N17361: U2.2 U11.4
N17377: U2.3 U11.5
N17389: U2.4 U11.6
N17405: U2.5 U11.7
N17419: U2.8 U11.8
N18435: U3.1 U12.3
N18441: U3.2 U12.4
N18449: U3.3 U12.5
N18455: U3.4 U12.6
N18463: U3.5 U12.7
N18467: U3.8 U12.8
N19671: U19.1 U27.3
N19677: U19.2 U27.4
N19685: U19.3 U27.5
N19691: U19.4 U27.6
N19699: U19.5 U27.7
N19703: U19.8 U27.8
N20776: U21.1 U29.3
N20782: U21.2 U29.4
N20790: U21.3 U29.5
N20796: U21.4 U29.6
N20804: U21.5 U29.7
N20808: U21.8 U29.8
N21881: U20.1 U28.3
N21887: U20.2 U28.4
N21895: U20.3 U28.5
N21901: U20.4 U28.6
N21909: U20.5 U28.7
N21913: U20.8 U28.8
N22986: U35.1 U43.3
N22992: U35.2 U43.4
N23000: U35.3 U43.5
N23006: U35.4 U43.6
N23014: U35.5 U43.7
N23018: U35.8 U43.8
N24091: U39.1 U45.3
N24097: U39.2 U45.4
N24105: U39.3 U45.5
N24111: U39.4 U45.6
N24119: U39.5 U45.7
N24123: U39.8 U45.8
N25196: U36.1 U47.3
N25202: U36.2 U47.4
N25210: U36.3 U47.5
N25216: U36.4 U47.6
N25224: U36.5 U47.7
N25228: U36.8 U47.8
N26301: U37.1 U48.3
N26307: U37.2 U48.4
N26315: U37.3 U48.5
N26321: U37.4 U48.6
N26329: U37.5 U48.7
N26333: U37.8 U48.8
N27406: U4.1 U16.3
N27412: U4.2 U16.4
N27420: U4.3 U16.5
N27426: U4.4 U16.6
N27434: U4.5 U16.7
N27438: U4.8 U16.8
N28511: U5.1 U17.3
N28517: U5.2 U17.4
N28525: U5.3 U17.5
N28531: U5.4 U17.6
N28539: U5.5 U17.7
N28543: U5.8 U17.8
N29616: U6.1 U18.3
N29622: U6.2 U18.4
N29630: U6.3 U18.5
N29636: U6.4 U18.6
N29644: U6.5 U18.7
N29648: U6.8 U18.8
N30721: U23.1 U32.3
N30727: U23.2 U32.4
N30735: U23.3 U32.5
N30741: U23.4 U32.6
N30749: U23.5 U32.7
N30753: U23.8 U32.8
N31826: U24.1 U34.3
N31832: U24.2 U34.4
N31840: U24.3 U34.5
N31846: U24.4 U34.6
N31854: U24.5 U34.7
N31858: U24.8 U34.8
N32931: U22.1 U31.3
N32937: U22.2 U31.4
N32945: U22.3 U31.5
N32951: U22.4 U31.6
N32959: U22.5 U31.7
N32963: U22.8 U31.8
N34036: U41.1 U49.3
N34042: U41.2 U49.4
N34050: U41.3 U49.5
N34056: U41.4 U49.6
N34064: U41.5 U49.7
N34068: U41.8 U49.8
N35141: U42.1 U50.3
N35147: U42.2 U50.4
N35155: U42.3 U50.5
N35161: U42.4 U50.6
N35169: U42.5 U50.7
N35173: U42.8 U50.8
N36246: U25.1 U30.3
N36252: U25.2 U30.4
N36260: U25.3 U30.5
N36266: U25.4 U30.6
N36274: U25.5 U30.7
N36278: U25.8 U30.8
N37351: U40.1 U46.3
N37357: U40.2 U46.4
N37365: U40.3 U46.5
N37371: U40.4 U46.6
N37379: U40.5 U46.7
N37383: U40.8 U46.8
N38456: U7.1 U13.3
N38462: U7.2 U13.4
N38470: U7.3 U13.5
N38476: U7.4 U13.6
N38484: U7.5 U13.7
N38488: U7.8 U13.8
N39561: U8.1 U14.3
N39567: U8.2 U14.4
N39575: U8.3 U14.5
N39581: U8.4 U14.6
N39589: U8.5 U14.7
N39593: U8.8 U14.8
N40666: U9.1 U15.3
N40672: U9.2 U15.4
N40680: U9.3 U15.5
N40686: U9.4 U15.6
N40694: U9.5 U15.7
N40698: U9.8 U15.8
N41771: U26.1 U33.3
N41777: U26.2 U33.4
N41785: U26.3 U33.5
N41791: U26.4 U33.6
N41799: U26.5 U33.7
N41803: U26.8 U33.8
N42876: U38.1 U44.3
N42882: U38.2 U44.4
N42890: U38.3 U44.5
N42896: U38.4 U44.6
N42904: U38.5 U44.7
N42908: U38.8 U44.8
N92531: D2.2 R4.2
N96106: C151.1 J4.4 L1.1 U51.1 U51.3(VIN)
N106192: D1.1 L1.2 U51.14 U51.16
N106413: R3.1 R5.2 U51.9
N107039: C153.1 U51.5
N107254: R1.1 U51.8
N107258: C156.1 R1.2
N107388: R2.1 U51.10
N107476: C155.1 U51.11

Pads without a net: J3 2 4 6 8 10 12 14 16 18 20 22 24 26 28 30 32 34 36 38 40; J5 16 18 20 22 24; U1 15; U2 15; U3 15; U4 15; U5 15; U6 15; U7 15; U8 15; U9 15; U10 2 9; U11 2 9; U12 2 9; U13 2 9; U14 2 9; U15 2 9; U16 2 9; U17 2 9; U18 2 9; U19 15; U20 15; U21 15; U22 15; U23 15; U24 15; U25 15; U26 15; U27 2 9; U28 2 9; U29 2 9; U30 2 9; U31 2 9; U32 2 9; U33 2 9; U34 2 9; U35 15; U36 15; U37 15; U38 15; U39 15; U40 15; U41 15; U42 15; U43 2 9; U44 2 9; U45 2 9; U46 2 9; U47 2 9; U48 2 9; U49 2 9; U50 2 9; U51 6

## Via types
v1: diameter 0.7, hole 0.4, TOP to BOTTOM, 666 vias

## Routing (per net, layer and track width the routed paths; a pad name or vN(x,y) marks a point on that pad's centre or on a via; arc(x,y) is an arc through that point)
3V3: length 54.8
  TOP w0.406: v1(173.9,6.2) R4.1
  BOTTOM w0.406: v1(173.9,6.2) 173.22,6.2 172.12,5.1 123.44,5.1 J5.38
48V: length 262.7
  TOP w0.406: U36.14 62.44,51.67 62.06,52.06 62.06,53.6 62.05,53.61 C113.1 62.05,55.07 63.73,56.76 C109.1 v1(62.3,58.7) ; U39.14 41.64,51.48 41.05,52.07 C115.1 41.05,54.51 41.93,55.39 C106.1 v1(40.5,58.9) ; 163.24,118.47 162.42,118.47 161.85,119.04 C18.1 161.85,121.61 162.45,122.21 162.56,122.21 163.13,122.78 C3.1 v1(161.5,126.3) ; v1(54.7,126.2) C6.1 56.33,122.79 55.65,122.11 C12.1 55.65,119.77 56.14,119.28 56.96,119.28 ; v1(167.7,93.2) C58.1 169.13,89.49 168.75,89.11 C70.1 168.75,85.76 169.13,85.38 U26.14 ; U41.14 104.14,50.98 103.55,51.57 C117.1 103.55,55.27 105.13,56.86 C107.1 v1(103.7,58.8) ; v1(18.8,58.9) C105.1 20.13,55.39 19.45,54.71 C111.1 19.45,53.79 19.1,53.44 19.1,52.42 19.74,51.77 U35.14 ; v1(97.2,125.8) C8.1 98.82,122.67 98.36,122.21 98.25,122.21 97.65,121.61 C17.1 97.65,121.39 96.9,120.64 96.9,119.83 97.96,118.78 98.78,118.78 ; U25.14 147.58,85.38 147.25,85.71 C68.1 147.25,88.61 148.13,89.49 C57.1 148.13,95.14 149.15,96.16 v1(150.24,96.16) ; U38.14 167.43,51.58 167.05,51.96 C112.1 167.05,54.71 168.53,56.19 C103.1 v1(167.2,59.4) ; v1(103.5,92.9) C61.1 105.18,90.96 103.95,89.73 C67.1 103.95,86.21 104.29,85.88 U23.14 ; v1(118.4,125.8) C9.1 119.85,122.2 C13.1 119.35,121.59 118.74,120.98 118.74,119.16 119.13,118.78 119.95,118.78 ; v1(123.2,58.8) C108.1 124.63,54.99 123.75,54.11 C118.1 123.75,51.73 124.51,50.98 U42.14 ; 36.76,119.28 35.94,119.28 35.56,119.66 35.56,121.39 36.25,122.09 C10.1 36.83,122.78 C5.1 v1(35.2,126.2) ; U22.14 82.24,85.88 81.86,86.26 81.86,87.44 81.85,87.44 C66.1 81.85,88.71 82.53,89.39 C60.1 v1(81.1,92.9) ; v1(145.1,59.1) C104.1 146.43,56.04 145.95,55.56 C116.1 145.95,51.67 146.34,51.27 U40.14 ; v1(125.8,92.6) C62.1 127.3,89.5 126.35,88.55 C69.1 126.35,86.1 126.87,85.58 127.69,85.58 ; v1(40,93.1) C59.1 41.43,89.99 40.45,89.01 C65.1 40.45,87.94 40.46,87.94 40.46,86.76 40.84,86.38 U21.14 ; 141.86,118.58 141.04,118.58 140.45,119.17 C16.1 140.45,122.96 140.83,123.34 C2.1 v1(139.3,126.4) ; v1(76.1,125.8) C7.1 77.79,122.65 76.85,121.71 C15.1 76.85,120.79 76.4,120.34 76.4,119.16 76.79,118.78 77.61,118.78 ; v1(182.5,126.9) C1.1 183.83,123.69 181.95,121.81 C14.1 181.95,118.97 182.44,118.47 U9.14 ; v1(15.8,126.2) C4.1 17.33,122.99 16.45,122.11 C11.1 16.45,121.89 15.66,121.09 15.66,119.66 16.04,119.28 16.86,119.28 ; 20.76,86.58 19.63,86.58 18.86,87.35 18.86,88.39 19.55,89.09 C64.1 19.55,90.06 19.93,90.44 C55.1 v1(18.6,93.5) ; U20.14 61.34,86.47 60.85,86.97 C63.1 60.85,89.55 61.73,90.43 C56.1 v1(60.2,93.5) ; v1(83.2,58.7) C110.1 84.76,56.12 83.25,54.61 C114.1 83.25,53.26 83.23,53.24 83.23,52.06 83.62,51.67 U37.14
  vias: v1(33.7,23.9) v1(34,25.4) v1(35.7,25.4) v1(35.7,24) v1(37.6,25.5) v1(37.6,23.9) v1(51.4,6.4) v1(51.4,4.4) v1(53.2,4.5) v1(53.3,6.4) v1(55.4,6.4) v1(55.5,4.4) v1(57.7,4.3) v1(57.9,6.3)
GND: length 876.4
  TOP w0.254: 15.6,11.9 J4.2 ; 15.6,11.9 16.6,12.9 C153.2 ; 15.6,11.9 16.08,11.9 17.55,10.43 C156.2 ; C155.2 30.65,12.01 29.21,13.45 U51.12 24.95,13.45 U51.17 23.45,12.45 U51.7
  TOP w0.406: v1(13.9,111.1) 11.64,111.1 11.18,111.57 U10.10 ; v1(13.9,111.1) 16.24,111.1 17.02,111.88 U10.1 ; v1(13.9,111.1) 11.18,108.38 U10.11 ; v1(13.9,111.1) 15.72,109.28 U10.18 ; v1(63.6,89.7) 63.2,89.3 C63.2 ; v1(80.3,76.9) 81.83,75.38 U31.18 ; v1(80.3,76.9) 78.14,76.9 77.28,77.77 U31.10 ; v1(80.3,76.9) 77.28,73.88 U31.11 ; v1(80.3,76.9) 82.26,76.9 83.12,77.77 U31.1 ; C73.1 89.97,85.08 88.8,83.9 v1(88.8,82.57) C81.1 ; U49.18 103.53,41.08 v1(101.9,42.7) ; C134.1 v1(49.38,49.6) C126.1 ; 147.22,44.74 147.22,43.67 146.46,42.9 v1(144.2,42.9) ; U32.11 99.66,73.86 v1(102.6,76.8) ; 99.69,83.92 100.47,83.92 v1(100.8,83.6) 100.47,83.28 U23.7 ; U20.6 57.17,84.53 v1(57.5,84.2) 57.17,83.88 U20.7 ; v1(144.2,42.9) 145.93,41.17 U46.18 ; v1(144.2,42.9) 141.38,40.08 U46.11 ; v1(144.2,42.9) 142.14,42.9 141.38,43.67 U46.10 ; U4.6 72.47,116.83 72.57,116.73 72.69,116.73 73.01,116.41 73.01,116.35 v1(73.16,116.2) 72.25,116.2 72.22,116.17 U4.7 ; 170.32,78.84 170.32,77.77 169.86,77.3 167.5,77.3 ; U49.1 104.83,43.37 104.16,42.7 v1(101.9,42.7) ; U29.10 35.58,78.37 36.14,77.8 v1(38.4,77.8) ; U32.10 99.66,77.77 100.63,76.8 v1(102.6,76.8) ; 113.96,84.89 113.96,84.68 112.58,83.29 112.58,82.57 ; 113.96,84.89 112.58,86.28 112.58,87 ; 113.96,84.89 v1(114.03,84.83) ; U18.18 118.75,106.62 118.28,107.1 v1(114.2,107.1) U18.11 ; C40.1 v1(126.88,108.8) C48.1 ; C15.2 v1(79.7,121.6) ; U17.10 93.05,110.67 94.22,109.5 95.62,109.5 ; U50.11 119.58,39.58 v1(122.6,42.6) ; C37.1 23.27,110.67 22.6,110 v1(22.6,109.2) 22.6,108.4 23.38,107.62 C46.1 ; v1(17.5,78.2) 19.23,76.47 U27.18 ; v1(17.5,78.2) 19.96,78.2 20.52,78.77 20.52,79.84 ; v1(17.5,78.2) 14.68,75.38 U27.11 ; v1(17.5,78.2) 15.24,78.2 14.68,78.77 U27.10 ; U47.10 57.58,43.57 58.15,43 v1(60.5,43) ; C7.2 v1(72.13,129.8) ; U12.10 51.17,111.47 51.74,110.9 v1(53.4,110.9) ; 164.54,83.42 165.28,83.42 165.7,83 165.7,82.91 v1(165.81,82.8) 165.7,82.8 165.68,82.78 U26.7 ; 90.78,48.17 v1(90.78,50.4) 90.78,52.8 ; v1(125,76.8) 122.59,76.8 121.92,77.47 U34.10 ; v1(125,76.8) 126.47,75.33 U34.18 ; v1(125,76.8) 127.1,76.8 127.77,77.47 U34.1 ; v1(125,76.8) 122.41,74.21 122.14,74.21 121.92,73.99 U34.11 ; C13.2 121.8,122.45 v1(121.8,122.9) ; 112.58,73.7 v1(112.58,76) 112.58,78.13 ; 95.62,109.5 93.05,106.93 U17.11 ; 95.62,109.5 v1(96.7,109.5) ; C121.1 v1(111.17,50.7) C130.1 ; v1(53.4,110.9) 51.17,108.67 U12.11 ; v1(53.4,110.9) 55.73,108.58 U12.18 ; v1(53.4,110.9) 56.46,110.9 57.02,111.47 U12.1 ; R2.2 v1(32,10) ; 163.28,39.16 163.28,40.27 v1(166.4,43.4) ; 69.08,86.6 v1(69.08,84.1) 69.08,82.13 ; U48.18 83.28,41.42 v1(81.6,43.1) ; C97.1 v1(133.97,75.6) C91.1 ; C116.2 v1(148.8,54.4) ; C125.1 v1(27.68,49.6) C133.1 ; v1(102.6,76.8) 104.54,76.8 105.51,77.77 U32.1 ; v1(102.6,76.8) 104.21,75.19 U32.18 ; 69.08,77.67 v1(69.08,75.4) 69.08,73.2 ; v1(139.7,96) 139.7,94.85 141.35,93.2 C57.2 ; C98.1 v1(27.18,75.3) C92.1 ; U48.1 84.58,43.57 84.11,43.1 v1(81.6,43.1) ; U19.6 15.88,84.62 v1(16.1,84.4) 15.68,83.97 U19.7 ; v1(81.6,43.1) 78.73,40.23 U48.11 ; v1(81.6,43.1) 79.2,43.1 78.73,43.57 U48.10 ; C24.1 105.67,118.08 v1(105.15,117.55) 105.67,117.03 C33.1 ; v1(50.2,77.5) C94.1 48.67,75.84 48.48,75.64 C100.1 ; v1(38.66,123) 38.6,122.94 38.6,122.61 38.19,122.2 C10.2 ; C66.2 v1(84.7,88.6) ; U33.10 v1(164.47,77.3) ; v1(164.47,77.3) U33.11 ; v1(164.47,77.3) 167.5,77.3 ; U24.6 122.78,83.62 v1(123.1,83.3) 122.78,82.97 U24.7 ; U50.1 125.42,43.37 124.66,42.6 v1(122.6,42.6) ; C58.2 v1(161.7,93.2) ; 71.89,110.67 72.26,110.3 v1(74.9,110.3) 77.37,110.3 77.74,110.67 U16.1 ; 71.89,110.67 U16.11 ; 71.89,110.67 U16.10 ; v1(160.2,110.3) 161.82,108.67 U14.18 ; v1(160.2,110.3) 162.56,110.3 163.12,110.87 U14.1 ; v1(160.2,110.3) 157.84,110.3 157.28,110.87 157.28,111.94 ; v1(160.2,110.3) 157.28,107.38 157.28,106.06 ; U45.18 41.23,41.58 v1(39.5,43.3) ; C127.1 v1(175.47,51.1) C119.1 ; C3.2 v1(158.9,126.3) ; v1(122.6,42.6) 124.12,41.08 U50.18 ; v1(122.6,42.6) 120.34,42.6 119.58,43.37 U50.10 ; 61.17,117.1 61.82,117.74 62.54,117.74 63.38,118.58 C27.1 ; 61.17,117.1 61.3,117.1 62.01,116.39 62.54,116.39 63.38,115.56 C36.1 ; 61.17,117.1 v1(60.8,117.1) ; C95.1 v1(89.97,75.8) C87.1 ; C49.1 v1(83.1,106.6) ; C54.1 63.38,106.63 v1(61.9,108.1) 62.38,108.58 62.38,108.65 63.38,109.64 C45.1 ; U6.6 115.28,116.83 115.4,116.7 v1(115.45,116.7) 115.35,116.6 115.35,116.59 115.03,116.27 114.32,116.27 U6.7 ; C26.1 43.1,119.33 v1(43.1,117.2) 43.1,115.01 C35.1 ; C120.1 v1(153.28,51) C128.1 ; C103.2 162.87,63.07 v1(163.4,63.6) ; C154.1 v1(190.8,12.5) ; C110.2 v1(80.3,58.7) ; U36.7 58.17,49.08 v1(58.6,49.5) 58.38,49.73 U36.6 ; U49.10 98.97,43.37 99.64,42.7 v1(101.9,42.7) ; v1(78.7,107) 78.01,107 78,107.01 76.83,107.01 76.46,106.64 76.46,105.88 U16.18 ; 169.68,115.73 169.5,115.91 v1(169.5,118.1) 169.5,120.33 169.68,120.5 ; U38.7 163.88,48.98 v1(164.1,49.2) 163.68,49.62 U38.6 ; U35.6 15.57,49.83 v1(15.9,49.5) 15.57,49.17 U35.7 ; 167.5,77.3 169.03,75.78 U33.18 ; 169.68,106.2 169.4,106.48 v1(169.4,108.5) 169.4,110.69 169.68,110.97 ; U45.1 42.52,43.77 42.06,43.3 v1(39.5,43.3) ; C84.1 v1(27.18,84.4) C76.1 ; C21.1 v1(190.07,118.1) C31.1 ; v1(101.9,42.7) 98.97,39.77 U49.11 ; v1(96.7,109.5) 97.6,108.6 U17.18 ; v1(96.7,109.5) 97.41,109.5 98.9,110.98 U17.1 ; v1(145.7,77.2) 142.78,74.28 142.78,73.06 ; v1(145.7,77.2) 147.32,75.58 U30.18 ; v1(145.7,77.2) 147.96,77.2 148.62,77.87 U30.1 ; v1(145.7,77.2) 143.44,77.2 142.78,77.87 142.78,78.94 ; v1(180.5,110.3) 177.78,107.58 177.78,107.13 ; v1(180.5,110.3) 183.06,110.3 183.62,110.87 U15.1 ; v1(180.5,110.3) 178.34,110.3 177.78,110.87 177.78,111.94 ; C2.2 v1(136.4,126.4) ; C147.1 132.07,39.43 130.3,41.2 v1(130.3,43.4) 130.4,43.4 130.47,43.47 C140.1 ; U13.1 141.43,110.97 140.86,110.4 v1(138.7,110.4) ; C117.2 v1(106.4,54.1) ; C8.2 v1(94.6,125.8) ; C139.1 v1(111.17,40.8) C146.1 ; v1(138.7,110.4) 135.57,107.28 U13.11 ; v1(138.7,110.4) 140.12,108.97 U13.18 ; v1(138.7,110.4) 136.14,110.4 135.57,110.97 U13.10 ; C113.2 v1(64.8,54.5) ; C89.1 v1(155.38,75.5) C101.1 ; C114.2 v1(86,54.5) ; C141.1 v1(27.68,40.6) C148.1 ; v1(38.4,77.8) 40.86,77.8 41.42,78.37 U29.1 ; v1(38.4,77.8) 35.58,74.97 U29.11 ; v1(38.4,77.8) 40.12,76.08 U29.18 ; U47.1 63.43,43.57 62.86,43 v1(60.5,43) ; 90.78,38.6 v1(90.78,40.9) 90.78,43.53 ; C55.2 v1(15.7,93.5) ; C44.1 v1(43.17,108.2) C53.1 ; U15.18 182.32,106.82 181.94,107.21 178.16,107.21 178.05,107.09 178,107.13 177.78,107.13 ; C18.2 v1(164.8,121.5) ; C6.2 v1(48.5,126.2) ; 35.94,84.42 36.67,84.42 v1(37.3,83.79) 37.28,83.78 U21.7 ; C42.1 v1(190.07,108.5) C52.1 ; C135.1 v1(175.47,41.6) C144.1 ; U7.7 137.07,115.97 v1(137.3,116.2) 136.88,116.62 U7.6 ; v1(123.1,94.6) 123.1,92.94 122.76,92.6 C62.2 ; U28.18 60.92,76.67 v1(59.3,78.3) ; C56.2 v1(57.2,93.5) ; U5.7 93.97,116.17 v1(94.3,116.5) 93.97,116.83 U5.6 ; U11.10 31.18,111.78 31.76,111.2 v1(34,111.2) 36.44,111.2 37.02,111.78 U11.1 ; C67.2 v1(106.5,88.6) ; C38.1 v1(148.3,111.2) ; C47.1 v1(105.67,108.9) C39.1 ; U41.6 100.04,49.02 v1(100.42,48.65) 100.14,48.38 U41.7 ; v1(59.3,78.3) 56.38,75.38 U28.11 ; v1(59.3,78.3) 56.84,78.3 56.38,78.77 U28.10 ; v1(59.3,78.3) 61.76,78.3 62.23,78.77 U28.1 ; 69.58,52.8 v1(69.58,50.6) 69.58,48.37 ; 177.78,107.13 177.78,106.06 ; 69.58,43.93 v1(69.58,41.7) 69.58,39.5 ; C115.2 v1(43.7,54.4) ; C28.1 23.18,116.72 22.5,117.4 v1(22.5,118.1) 23.18,118.78 C22.1 ; v1(39.5,43.3) 36.67,40.48 U45.11 ; v1(39.5,43.3) 37.14,43.3 36.67,43.77 U45.10 ; U9.6 178.47,116.53 v1(178.8,116.2) 178.47,115.88 U9.7 ; C102.1 176.97,74.62 v1(176.3,75.3) 176.97,75.97 C90.1 ; C14.2 v1(184.8,121.7) ; U8.7 158.18,115.88 v1(158.52,116.22) 158.22,116.53 U8.6 ; U3.7 v1(52.6,116.67) 51.95,117.33 U3.6 ; U42.6 120.62,49.02 121.27,48.38 ; 121.27,48.38 v1(121.32,48.32) ; 121.27,48.38 U42.7 ; C71.1 v1(155.38,85) C79.1 ; v1(166.4,43.4) 163.84,43.4 163.28,43.97 163.28,45.04 ; v1(166.4,43.4) 168.56,43.4 169.12,43.97 U44.1 ; v1(166.4,43.4) 167.82,41.98 U44.18 ; C131.1 132.07,48.96 132.9,49.78 v1(132.9,50.6) 132.9,51.45 132.07,52.27 C122.1 ; U37.6 79.58,49.73 v1(79.8,49.5) 79.38,49.08 U37.7 ; C34.1 v1(126.88,117.7) C25.1 ; U39.6 37.77,49.52 v1(38,49.3) 37.58,48.88 U39.7 ; C112.2 v1(169.9,54.6) ; C69.2 v1(129.2,88.4) ; 14.47,45.34 14.47,44.27 14.84,43.9 v1(17.4,43.9) 19.96,43.9 20.32,44.27 U43.1 ; U22.7 78.08,83.28 v1(78.4,83.6) 78.08,83.92 77.34,83.92 ; U1.6 v1(9.38,117.33) 10.03,116.67 U1.7 ; U11.11 31.18,107.43 v1(31.7,107.95) ; C16.2 v1(143.3,121.6) ; C11.2 18.15,122.11 19.04,123 v1(19.3,123) ; v1(60.5,43) 62.13,41.37 U47.18 ; v1(60.5,43) 57.58,40.08 U47.11 ; C118.2 v1(125.45,53.05) ; C65.2 v1(43.3,88.9) ; C80.1 177.2,82.86 v1(177.2,84.9) 176.97,85.12 C72.1 ; C29.1 148.88,117.56 148.78,117.66 v1(148.78,118.3) C19.1 ; C9.2 v1(112.5,125.8) ; U2.6 31.88,117.33 v1(32.3,116.9) 32.08,116.67 U2.7 ; U11.18 v1(35.73,107.88) ; C108.2 v1(117.5,58.8) ; C83.1 v1(133.97,84.6) C75.1 ; C64.2 v1(22.6,89.2) ; 84.08,119.9 v1(84.08,117.7) 84.08,115.47 ; U40.7 142.07,48.67 v1(142.5,49.1) 142.28,49.33 U40.6 ; U18.1 120.05,110.67 119.38,110 v1(117,110) 114.87,110 114.2,110.67 U18.10 ; C109.2 v1(59.5,58.7) ; U25.7 143.57,82.78 v1(144,83.2) 143.78,83.42 142.99,83.42 ; C104.2 v1(142.2,59.1) ; C107.2 99.47,60.74 98.45,61.76 v1(97.34,61.76) ; C50.1 v1(150.7,106.6) ; C111.2 v1(22.2,54.6) ; C106.2 v1(37.8,58.9) ; C5.2 v1(32.7,126.2) ; C17.2 v1(100.3,121.5) ; C70.2 v1(171.6,88.3) ; C137.1 v1(153.28,41.4) C145.1 ; C1.2 v1(179.5,126.9) ; C157.2 v1(190.3,7.9) ; C105.2 v1(16.1,58.9) ; C61.2 v1(99.51,96.5) ; C43.1 v1(83.2,110.9) ; D2.1 v1(182.5,6.2) ; C59.2 v1(37,93.1) ; C60.2 v1(75.2,92.9) ; C68.2 v1(150.1,88.5) ; 14.47,39.46 v1(14.47,40.67) ; C78.1 v1(48.67,83.9) C86.1 ; C4.2 v1(9.8,126.2) ; U43.18 v1(19.02,40.67) ; C12.2 v1(58.7,122) ; C150.1 v1(49.38,40.6) C142.1
  GND w0.279: J4.2 14.2,12.88 ; J4.2 14.2,10.92 ; J4.2 11.82,11.9 ; J4.2 16.58,11.9 ; 119.24,8.32 J5.39 ; J5.39 119.24,10.28 ; J5.39 120.22,9.3 ; J5.39 118.26,9.3 ; 11.1,14.22 J4.3 ; J4.3 10.12,16.6 ; J4.3 11.1,18.98 ; J4.3 12.08,16.6 ; 121.78,8.32 J5.37 ; J5.37 120.8,9.3 ; J5.37 122.76,9.3
  vias: v1(5.7,15.6) v1(5.8,18) v1(5.9,13.1) v1(6.3,20) v1(7.6,18) v1(7.6,15.5) v1(7.6,13) v1(8.3,20.3) v1(9.3,18.1) v1(9.4,15.5) v1(9.7,13) v1(10.5,20) v1(11.5,13.2) v1(24.7,11.1) v1(24.7,9.3) v1(25.5,21.5) v1(26.7,17.9) v1(26.8,19.8) v1(27.7,21.6) v1(28.5,17.9) v1(28.7,19.7) v1(29.8,21.5)
COE_CLR#: length 711.2
  TOP w0.203: 53.9,103.1 55.08,104.28 U12.17 ; 53.9,103.1 74.8,103.1 ; 53.9,103.1 34.4,103.1 ; 125.4,70.1 103.15,70.1 ; 125.4,70.1 125.82,70.52 U34.17 ; 125.4,70.1 146.1,70.1 ; 103.15,70.1 80.78,70.1 80.49,70.39 ; 103.15,70.1 103.56,70.51 U32.17 ; 117.65,102.95 117.61,102.9 96.2,102.9 ; 117.65,102.95 138.35,102.95 139.47,104.08 139.47,105 ; 117.65,102.95 118.1,103.39 U18.17 ; 61.2,36.3 61.25,36.25 82.35,36.25 ; 61.2,36.3 61.15,36.25 43.17,36.25 42.97,36.45 40.83,36.45 40.67,36.3 39.7,36.3 ; 61.2,36.3 61.48,36.58 61.48,36.72 61.48,36.73 61.48,37.27 61.48,37.28 U47.17 ; U43.17 18.38,38.5 20.57,36.3 39.7,36.3 ; U29.17 39.48,71.45 38.42,70.39 ; 139.47,105 139.57,104.9 155.62,104.9 155.72,105 v1(156.3,105) ; 139.47,105 U13.17 ; 74.8,103.1 80.8,103.1 81.59,102.31 95.61,102.31 96.2,102.9 ; 74.8,103.1 75.35,103.65 75.37,103.65 75.75,104.03 75.75,104.05 75.79,104.09 U16.17 ; 80.49,70.39 81.17,71.08 U31.17 ; 80.49,70.39 59.32,70.39 ; U10.17 15.07,105.6 17.57,103.1 34.4,103.1 ; 123.25,36.25 v1(124.1,36.25) 130.13,36.25 130.39,35.99 144.57,35.99 144.59,36.01 ; 123.25,36.25 123.47,36.48 U50.17 ; 123.25,36.25 102.75,36.25 ; 146.1,70.1 154.3,70.1 154.31,70.09 167.69,70.09 ; 146.1,70.1 146.68,70.67 146.68,73.06 ; 195.2,74.1 195.2,37.3 193.9,36 166.5,36 ; 195.2,74.1 191.19,70.09 167.69,70.09 ; 195.2,74.1 196.7,75.6 196.7,94.6 188.07,103.23 180.87,103.23 180.8,103.3 ; 34.4,103.1 35.08,103.78 U11.17 ; 144.59,36.01 144.6,36 166.5,36 ; 144.59,36.01 145.28,36.69 U46.17 ; v1(124.1,30.8) 124.1,27.7 116.7,20.3 116.7,13.4 120.34,9.76 120.34,9.16 121.64,7.86 123.22,7.86 J5.36 ; 180.8,103.3 180.5,103 163.27,103 v1(161.89,104.39) 161.18,105.1 161.18,106.06 ; 180.8,103.3 181.68,104.17 181.68,104.5 181.68,104.5 181.68,105.05 181.68,105.05 181.68,106.06 ; 166.5,36 167.18,36.67 167.18,39.16 ; 82.35,36.25 82.63,36.53 U48.17 ; 82.35,36.25 82.51,36.1 101.87,36.1 102.03,36.25 102.75,36.25 ; U33.17 168.38,71.49 168.4,71.46 168.4,70.8 167.69,70.09 ; 39.7,36.3 39.95,36.55 39.97,36.55 40.35,36.93 40.35,36.95 40.58,37.17 U45.17 ; 96.2,102.9 96.95,103.65 U17.17 ; 102.75,36.25 102.95,36.46 102.95,37.27 102.88,37.35 U49.17 ; 59.32,70.39 60.27,71.35 U28.17 ; 59.32,70.39 38.42,70.39 ; 38.42,70.39 38.38,70.35 21.12,70.35 18.57,72.9 U27.17
  BOTTOM w0.203: v1(124.1,36.25) v1(124.1,30.8) ; v1(161.89,104.39) 161.27,105 v1(156.3,105)
COE_LDAC#: length 885.5
  TOP w0.203: U13.12 136.22,105.55 135.11,104.43 135.11,104.41 v1(134.7,104) ; U46.12 142.03,38.25 141.59,37.82 141.12,37.82 v1(140.1,36.8) ; 15.32,73.96 15.32,69.67 20.1,64.9 v1(34.1,64.9) v1(54.8,64.9) v1(77.8,64.9) v1(99,64.9) v1(120.9,64.9) v1(142.1,64.9) v1(163.2,64.9) v1(190.5,64.9) ; U14.12 157.93,102.17 160.7,99.4 ; U30.12 143.43,72.33 142.31,71.21 142.3,71.21 142.1,71.01 v1(142.1,71) ; U15.12 178.43,105.42 v1(177.1,104.1) ; U17.12 93.7,104.9 93.19,104.39 85.91,104.39 v1(85.5,104.8) ; v1(113.2,104.3) 113.61,104.71 114.67,104.71 114.85,104.9 U18.12 ; U12.12 51.83,106.05 50.61,104.83 50.61,104.81 v1(50.2,104.4) ; U28.12 57.02,73.35 56.59,72.92 55.98,72.92 55.1,72.04 v1(55.1,71.2) ; U16.12 72.54,107.44 74.61,109.51 76.59,109.51 v1(77.9,108.2) ; v1(120.9,71) 121.51,71.61 122.13,71.61 122.57,72.05 U34.12 ; U44.12 163.93,38.55 162.91,37.53 162.91,37.21 v1(162.5,36.8) ; 116.1,31.8 v1(98.1,31.8) v1(78.1,31.8) v1(56.9,31.8) v1(42.9,31.8) 17.9,31.8 15.12,34.58 U43.12 ; 116.1,31.8 v1(119.3,31.8) v1(140.1,31.8) v1(162.5,31.8) v1(190.3,31.8) ; 116.1,31.8 108.7,24.4 108.7,9.6 114.91,3.39 133.65,3.39 J5.26 ; U48.12 79.26,38.64 79.26,37.96 79,37.7 78.74,37.7 v1(78.05,37.01) ; 142.8,97.6 158.9,97.6 160.7,99.4 ; 142.8,97.6 v1(113.2,97.6) v1(85.2,97.6) 78.5,97.6 v1(77.9,98.2) v1(50.2,98.2) v1(29.7,98.2) 20.83,98.2 20.83,98.2 14.6,98.2 11.82,100.97 U10.12 ; 142.8,97.6 143.8,98.6 v1(143.8,100.6) ; U47.12 58.23,38.03 57.86,37.66 57.56,37.66 v1(56.9,37) ; U49.12 99.5,38.44 99.5,37.83 99.19,37.52 98.62,37.52 v1(98.1,37) ; v1(29.7,103.9) 30.11,104.31 30.11,104.33 31.82,106.05 31.82,106.66 ; 160.7,99.4 v1(177.1,99.4) ; v1(36.1,37.1) 37.33,38.33 U45.12 ; v1(98.7,71.1) 99.52,71.92 99.88,71.92 100.31,72.35 U32.12 ; v1(77.8,71.1) 77.8,71.87 77.92,72 U31.12 ; U29.12 36.23,72.95 35.79,72.52 35.42,72.52 v1(34.4,71.5) ; v1(119,37) 119,37.32 119.2,37.52 119.79,37.52 120.22,37.95 U50.12 ; v1(163.2,70.8) 164.32,71.92 164.69,71.92 165.12,72.35 U33.12
  BOTTOM w0.203: v1(134.7,104) 134.7,103.42 137.52,100.6 v1(143.8,100.6) ; v1(120.9,64.9) v1(120.9,71) ; v1(34.4,71.5) 34.1,71.2 v1(34.1,64.9) ; v1(163.2,64.9) v1(163.2,70.8) ; v1(162.5,36.8) 162.5,36.52 162.71,36.31 162.71,32.29 162.5,32.08 v1(162.5,31.8) ; v1(113.2,97.6) v1(113.2,104.3) ; v1(54.8,64.9) 54.8,70.32 55.1,70.62 v1(55.1,71.2) ; v1(36.1,37.1) 36.1,36.52 36.28,36.35 36.65,36.35 40.3,32.7 42,32.7 v1(42.9,31.8) ; v1(78.1,31.8) 78.1,36.38 78.05,36.43 v1(78.05,37.01) ; v1(77.9,108.2) 77.9,107.42 77.89,107.42 77.89,98.78 77.9,98.78 v1(77.9,98.2) ; v1(98.7,71.1) 98.7,65.78 99,65.48 v1(99,64.9) ; v1(77.8,71.1) v1(77.8,64.9) ; v1(29.7,98.2) v1(29.7,103.9) ; v1(119.3,31.8) 119.3,36.12 119,36.42 v1(119,37) ; v1(50.2,104.4) v1(50.2,98.2) ; v1(177.1,104.1) v1(177.1,99.4) 178.5,99.4 190.5,87.4 v1(190.5,64.9) 190.5,32.58 190.3,32.38 v1(190.3,31.8) ; v1(98.1,31.8) v1(98.1,37) ; v1(140.1,31.8) v1(140.1,36.8) ; v1(142.1,71) v1(142.1,64.9) ; v1(56.9,31.8) v1(56.9,37) ; v1(85.2,97.6) 85.2,103.92 85.5,104.22 v1(85.5,104.8)
COE_SCLK: length 784.7
  TOP w0.203: U50.15 122.17,37.95 121.9,37.68 121.9,37.21 121.9,37.2 v1(121.9,37) ; v1(74.8,107.5) 74.8,106.78 74.49,106.47 U16.15 ; v1(157.11,103.4) 142.18,103.4 142.18,103.4 v1(141.6,103.4) 141,103.4 138.5,100.9 v1(116.4,100.9) v1(81.7,100.9) 76.68,100.9 76.28,101.3 v1(75.7,101.3) 75.12,101.3 75.12,101.3 54.68,101.3 54.67,101.3 v1(53.4,101.3) v1(33.5,101.3) 16.5,101.3 13.78,104.02 U10.15 ; J5.32 127.54,4.9 119.3,4.9 113.6,10.6 113.6,22.4 v1(121.9,30.7) ; U11.15 33.77,105.17 33.5,104.9 v1(33.5,103.9) ; U44.15 165.88,37.85 165.6,37.58 v1(165.6,37) ; v1(101.3,37) 101.3,37.68 101.58,37.95 U49.15 ; v1(180.37,104.13) 180.37,105.05 180.38,105.05 U15.15 ; v1(193.4,67.7) v1(166.5,67.7) v1(145.1,67.7) v1(124.1,67.7) v1(102,67.7) v1(79.7,67.7) v1(57.8,67.7) v1(37,67.7) 21.5,67.7 17.27,71.92 U27.15 ; U30.15 145.38,71.85 145.1,71.58 v1(145.1,70.9) ; U14.15 159.88,104.02 v1(160.5,103.4) 162.13,101.77 v1(180.37,101.77) ; U48.15 81.33,37.53 81,37.2 81,37.1 v1(81,37.1) ; U46.15 143.97,38.25 143.73,38.01 143.73,37.96 143.61,37.83 143.61,37.41 v1(143.2,37) ; U43.15 17.07,37.62 19.8,34.9 v1(42.9,34.9) v1(59.9,34.9) v1(81.1,34.9) v1(101.3,34.9) v1(121.9,34.9) v1(143.2,34.9) 143.8,34.3 v1(165.6,34.3) v1(193.4,34.3) ; v1(53.4,104.7) 53.4,105.32 53.77,105.7 U12.15 ; U29.15 38.17,72.08 v1(37.5,71.4) ; v1(59.9,37) 60.18,37.28 U47.15 ; v1(137.7,104.2) 137.7,104.5 138.18,104.97 U13.15 ; v1(38.81,37.05) 38.81,37.88 39.27,38.35 U45.15 ; v1(101.8,71.1) 101.8,71.4 102.26,71.86 U32.15 ; v1(58.3,71.2) 58.3,71.81 58.98,72.49 58.98,73.96 ; v1(81.7,104.5) 83.08,103.12 94.22,103.12 95.65,104.55 U17.15 ; v1(124.11,70.89) 124.14,70.92 124.14,71.24 124.52,71.62 U34.15 ; v1(166.5,70.9) 166.5,71.78 167.07,72.35 U33.15 ; U31.15 79.88,72.1 79.7,71.93 v1(79.7,71.1) ; v1(116.4,103.7) 116.81,104.11 116.81,104.38 116.8,104.39 U18.15
  BOTTOM w0.203: v1(116.4,100.9) v1(116.4,103.7) ; v1(157.11,103.4) 159.82,103.4 159.83,103.4 v1(160.5,103.4) ; v1(137.7,104.2) 137.7,104.78 137.88,104.96 138.4,104.96 138.41,104.97 138.95,104.97 138.96,104.96 140.04,104.96 v1(141.6,103.4) ; v1(37,67.7) 37,70.87 37.25,71.13 37.25,71.15 v1(37.5,71.4) ; v1(145.1,67.7) v1(145.1,70.9) ; v1(101.3,34.9) v1(101.3,37) ; v1(81.1,34.9) 81.1,36.42 81,36.52 v1(81,37.1) ; v1(121.9,37) 121.9,36.42 121.9,36.42 v1(121.9,34.9) 121.9,31.28 121.9,31.28 v1(121.9,30.7) ; v1(59.9,37) v1(59.9,34.9) ; v1(42.9,34.9) 41.7,34.9 40.05,36.55 39.43,36.55 39.1,36.88 38.98,36.88 v1(38.81,37.05) ; v1(75.7,101.3) 75.7,101.88 75.75,101.94 75.75,104.57 74.8,105.53 v1(74.8,107.5) ; v1(124.1,67.7) 124.1,70.3 124.11,70.31 v1(124.11,70.89) ; v1(58.3,71.2) 57.8,70.7 v1(57.8,67.7) ; v1(53.4,101.3) v1(53.4,104.7) ; v1(81.7,104.5) v1(81.7,100.9) ; v1(193.4,34.3) v1(193.4,67.7) 193.4,92.6 184.23,101.77 v1(180.37,101.77) v1(180.37,104.13) ; v1(101.8,71.1) 101.8,70.52 102,70.32 v1(102,67.7) ; v1(79.7,67.7) v1(79.7,71.1) ; v1(165.6,37) v1(165.6,34.3) ; v1(166.5,67.7) v1(166.5,70.9) ; v1(33.5,103.9) v1(33.5,101.3) ; v1(143.2,34.9) v1(143.2,37)
